# Altium PCB Sensor.PcbDoc (part 1 of 2)
Units mm, origin at the board's own origin, x right, y up, seen from the top; angles counter-clockwise.
Board outline 55 x 40.2 mm, 4 copper layers (Top Layer, Layer 1, Layer 2, Bottom Layer), stack 0.603 mm thick; 83 components, 66 nets, 402 pads, 132 vias.
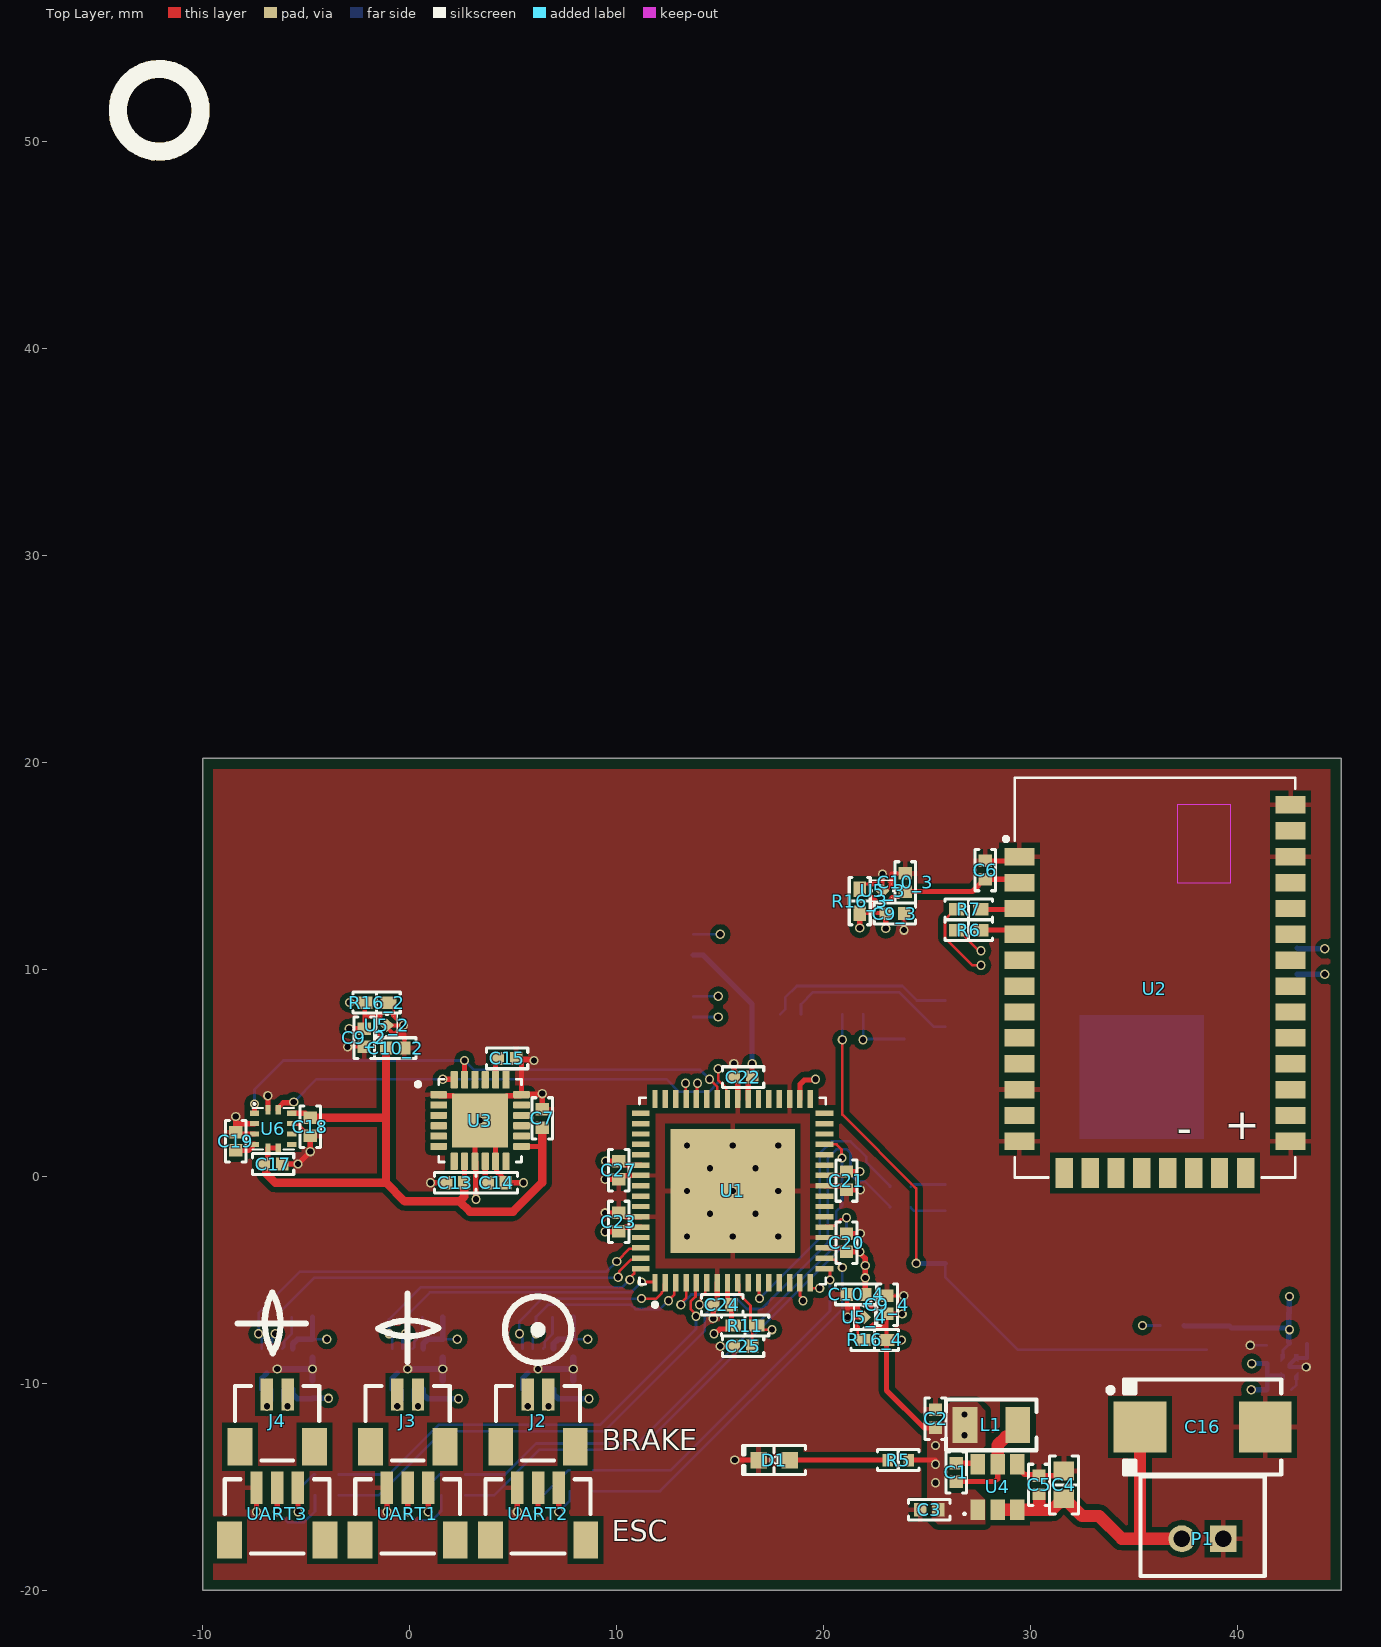
[diagram p0: Top Layer view]
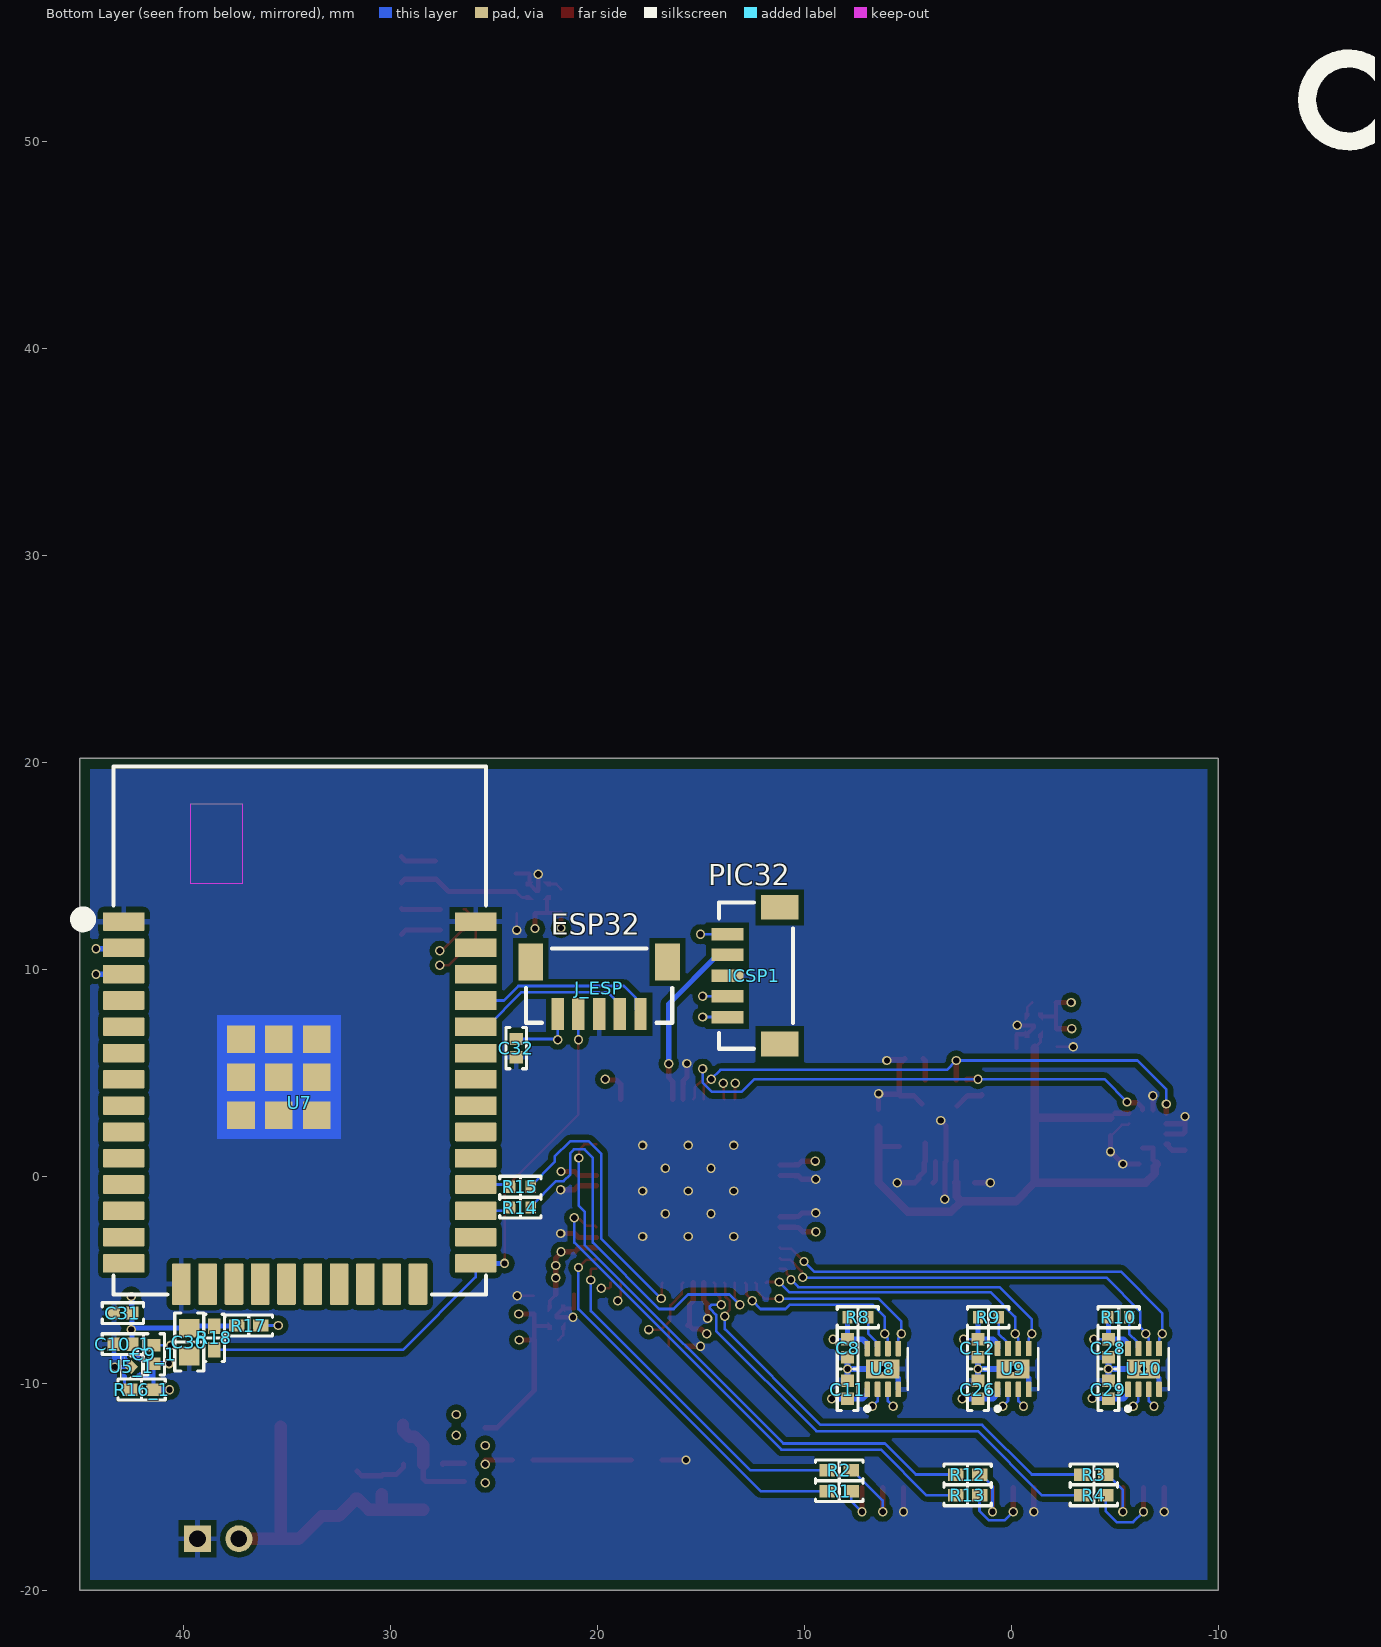
[diagram p1: Bottom Layer view, seen from below]
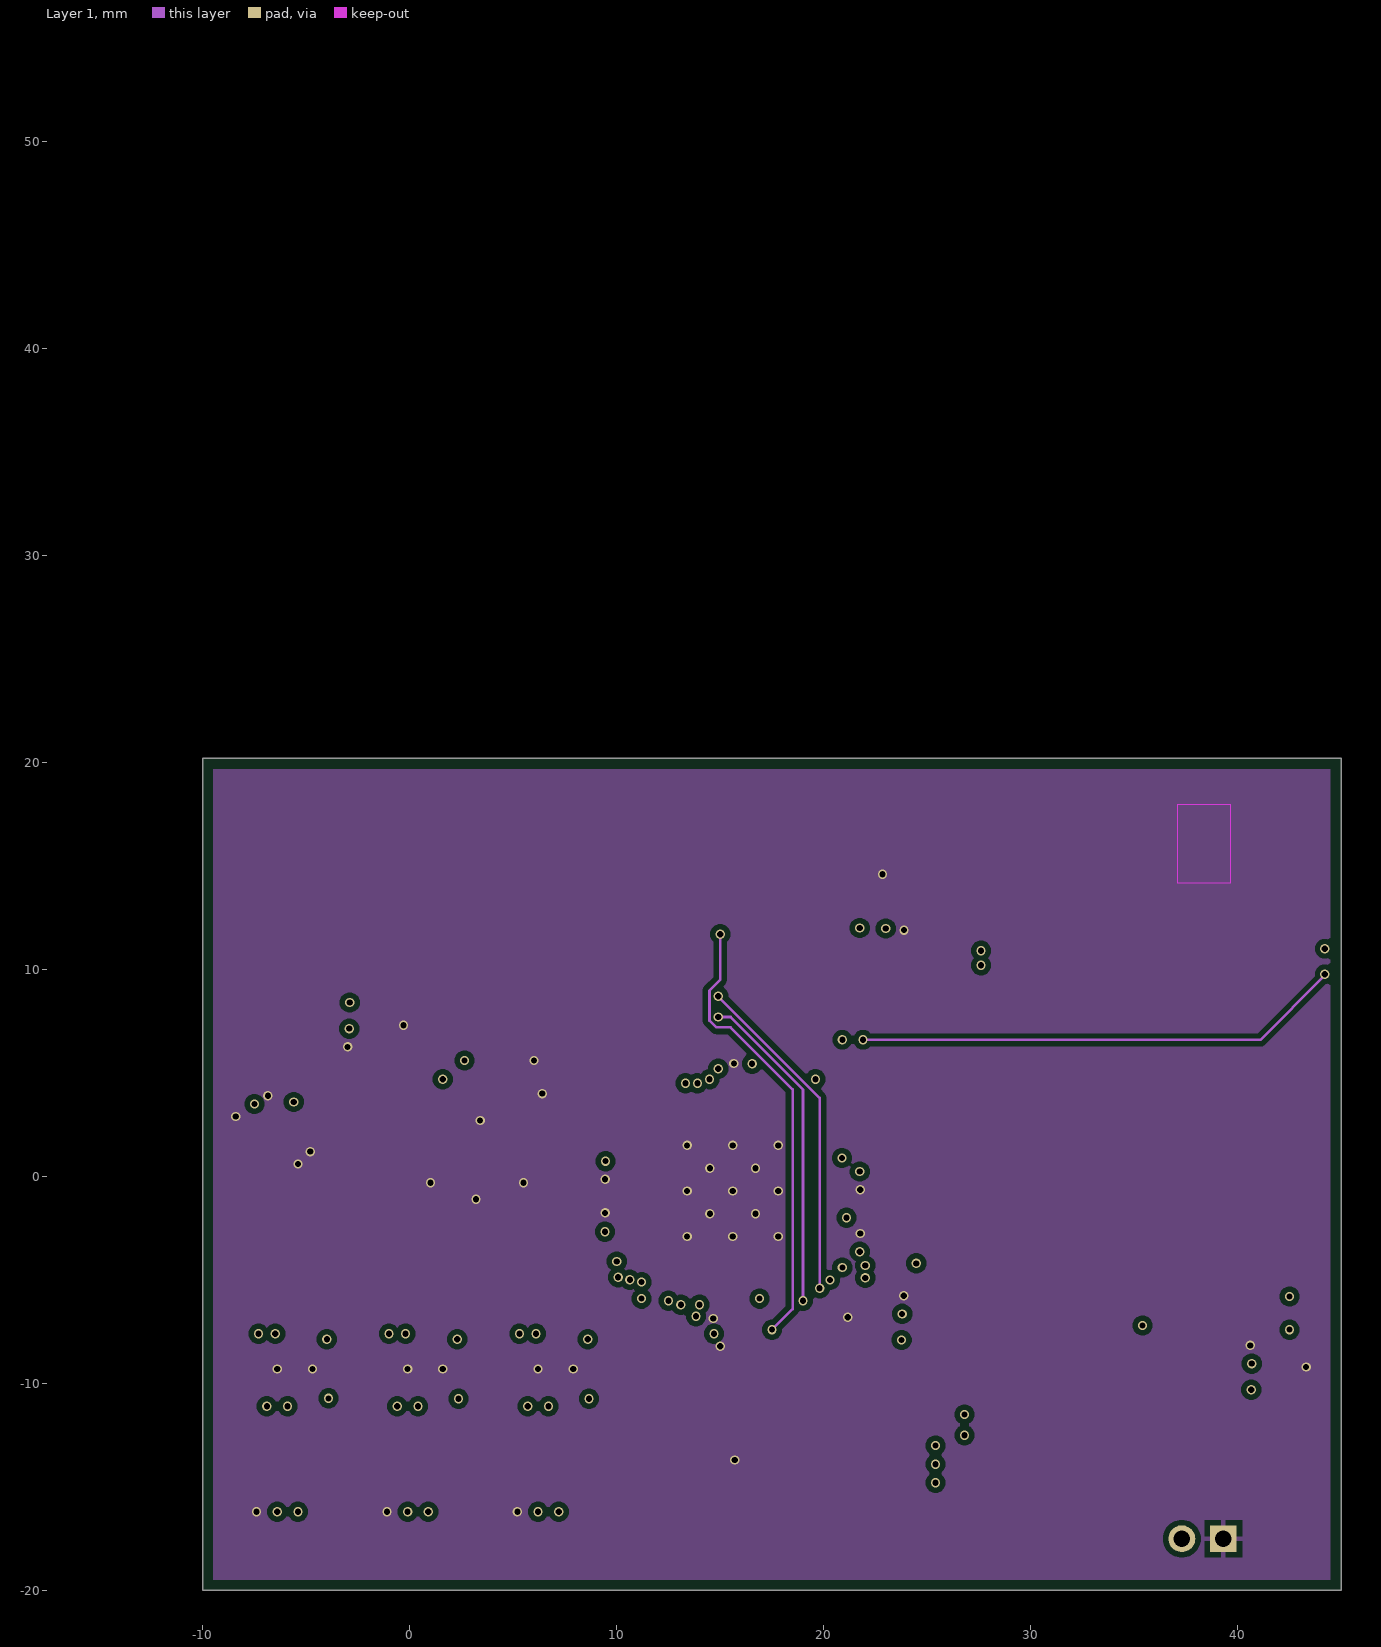
[diagram p2: Layer 1]
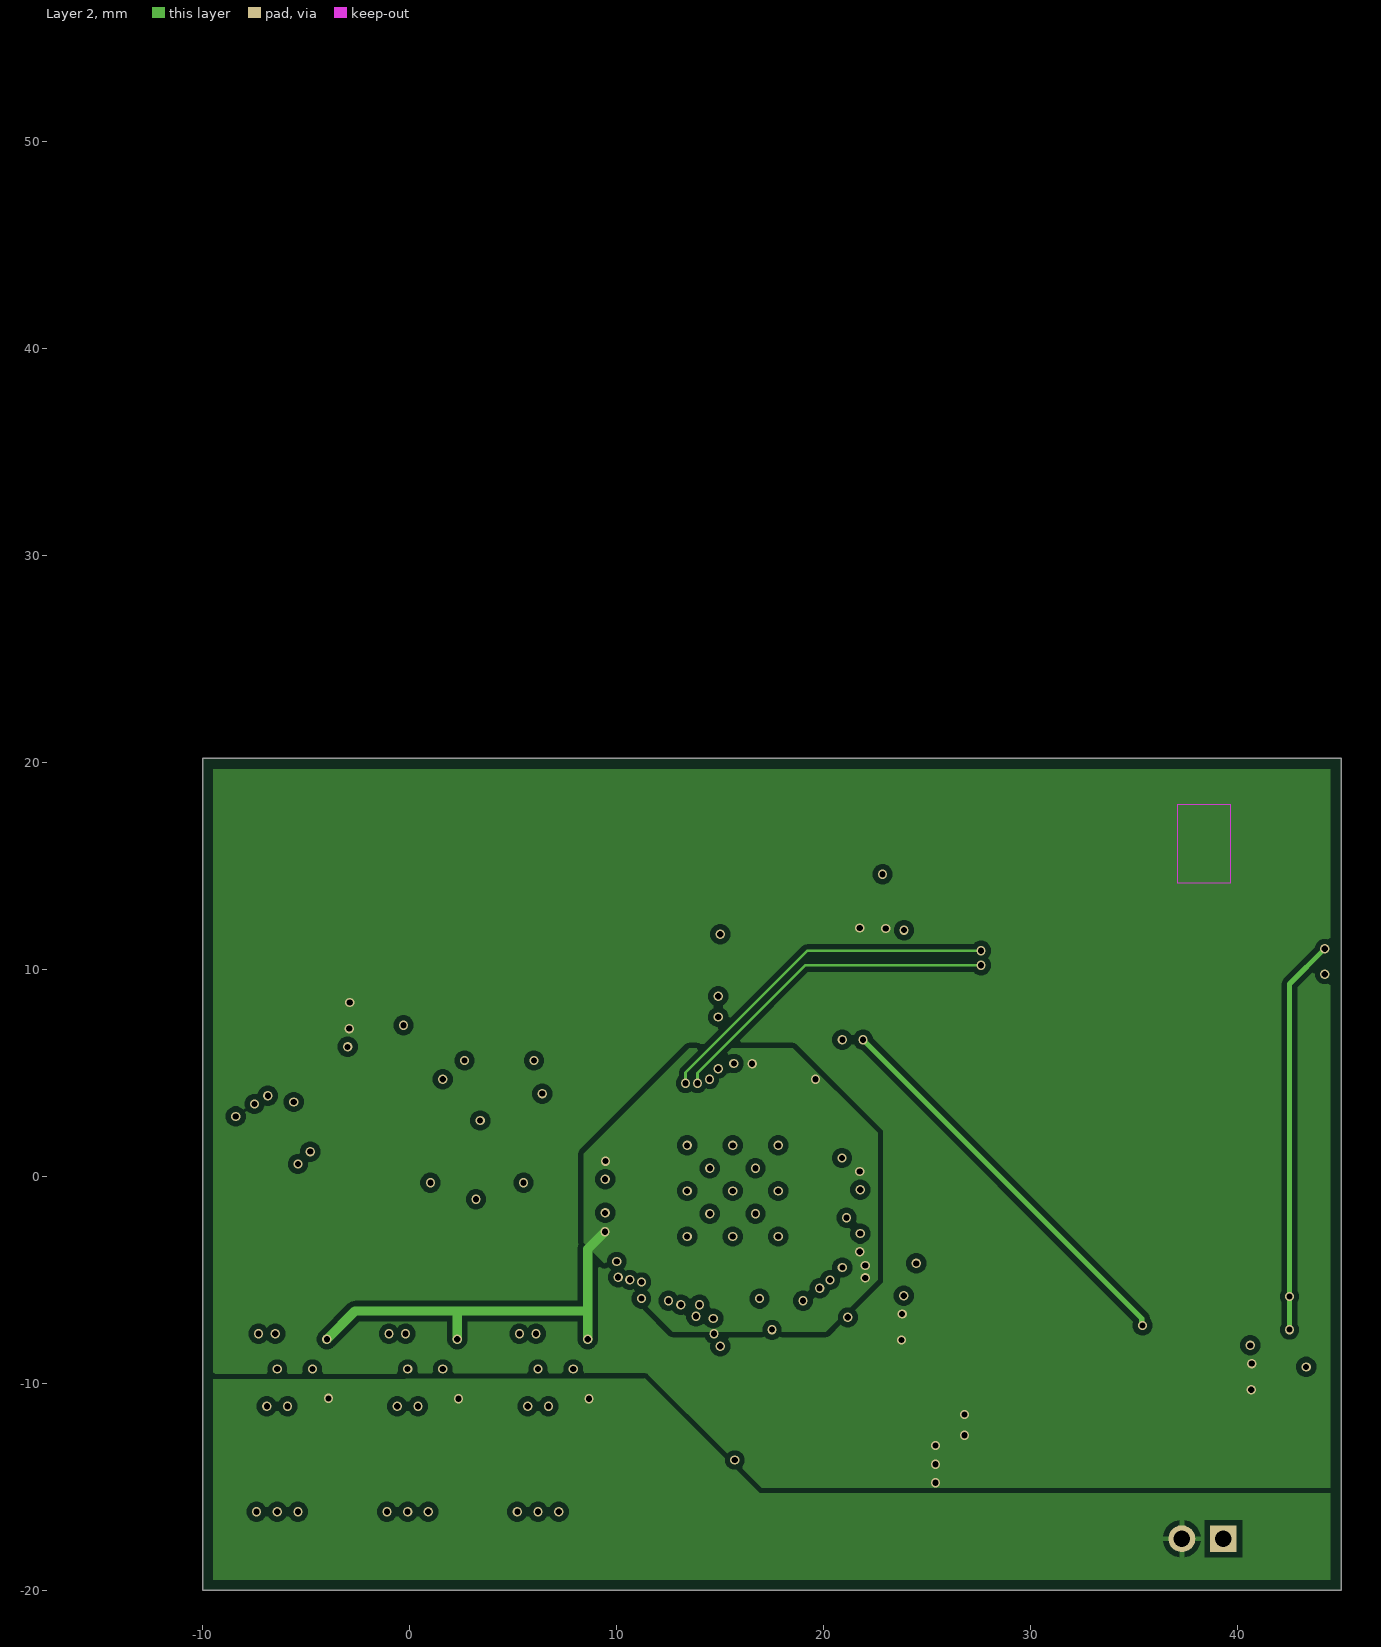
[diagram p3: Layer 2]

## Layer stack, top to bottom
Top Solder: solder mask 0.0102, Solder Resist, Dk 3.5
Top Layer: signal copper 0.0356
Dielectric 2: prepreg 0.0711, PP-006, Dk 4.1
Layer 1: signal copper 0.035
Dielectric 1: dielectric 0.32, FR-4, Dk 4.8
Layer 2: signal copper 0.035
Dielectric 3: prepreg 0.0711, PP-006, Dk 4.1
Bottom Layer: signal copper 0.0356
Bottom Solder: solder mask 0.0102, Solder Resist, Dk 3.5

## Board outline
-10,-20 -10,20.2 45,20.2 45,-20

## Design rules (kind name [scope] priority, off if disabled: settings)
BoardOutlineClearance [All] p1: gap=0.512 ignorepadtopadclearanceinfootprint=FALSE
Clearance "PolyGon Pour Clearance" [InPolygon] p1: gap=0.254 ignorepadtopadclearanceinfootprint=FALSE except(0: Arc-Hole Track-Hole SMDPad-Hole THPad-Hole Via-Hole Fill-Hole Poly-Hole Region-Hole Text-Hole; 0.512: Arc-Text Track-Text SMDPad-Text THPad-Text Via-Text Fill-Text Poly-Text Region-Text Text-Text)
Clearance [All] p2: gap=0.127 ignorepadtopadclearanceinfootprint=TRUE
HoleSize [All] p1: absolutevalues=TRUE maxlimit=10 minlimit=0.025 maxpercent=80.000 minpercent=20.000
PolygonConnect PolygonRelief [IsPolygon and not (IsNamedPolygon('PolygonDirect'))] p1: thpad.connectstyle=Relief thpad.reliefconductorwidth=0.254 thpad.reliefentries=4 thpad.polygonreliefangle="90 Angle" thpad.airgapwidth=0.254 smdpad.connectstyle=Relief smdpad.reliefconductorwidth=0.254 smdpad.reliefentries=4 smdpad.polygonreliefangle="90 Angle" smdpad.airgapwidth=0.254 via.connectstyle=Direct via.reliefconductorwidth=0.254 via.reliefentries=4 via.polygonreliefangle="90 Angle" via.airgapwidth=0.254
PolygonConnect PolygonDirect [All] p2: connectstyle=Direct reliefconductorwidth=0.254 reliefentries=4 polygonreliefangle="90 Angle" airgapwidth=0.254
RoutingVias [All] p1: holewidth=0.3 width=0.5 viastyle="Through Hole" minholewidth=0.3 minwidth=0.45 maxholewidth=0.7 maxwidth=1.27
SolderMaskExpansion [All] p1: expansion=0.102 istentingtop=FALSE
SupplyNets "Schematic Supply Nets" [InNet('VBAT')] p1: voltage=0.000
SupplyNets "Schematic Supply Nets_7" [InNet('3V3_ESP')] p2: voltage=0.000
SupplyNets "Schematic Supply Nets_5" [InNet('3V3_IMU')] p3: voltage=0.000
SupplyNets "Schematic Supply Nets_4" [InNet('3V3')] p4: voltage=0.000
SupplyNets "Schematic Supply Nets_3" [InNet('GND')] p5: voltage=0.000
SupplyNets "Schematic Supply Nets_2" [InNet('3V3_XBee')] p6: voltage=0.000
SupplyNets "Schematic Supply Nets_1" [InNet('5V')] p7: voltage=0.000
Width [All] p1: maxlimit=0.712 minlimit=0.127 preferedwidth=0.254
29 further rules are at their usual default settings.

## Classes and differential pairs
component class U_ESP32: C30 C31 C32 J_ESP R17 R18 U7
component class U_HBridges: C8 C11 C12 C26 C28 C29 J2 J3 J4 R8 R9 R10 U8 U9 U10
channel class 3V3_LDO: U_3V3_LDO2

## Components (designator, comment, footprint, x,y, rotation, side; value= is the part's Value field where it differs from the comment)
C1 "1 µF" "CAP 0402_1005" 26.4,-14.3 r270 top
C2 "1 µF" "CAP 0402_1005" 25.4,-11.7 r270 top
C3 "22 µF" "CAP 0402_1005" 25.1,-16.1 r0 top
C4 "22 µF" "CAP 0603_1608" 31.6,-14.9 r270 top
C5 "0.1 µF" "CAP 0402_1005" 30.4,-14.9 r270 top
C6 "1 µF" "CAP 0402_1005" 27.8,14.8 r90 top
C7 "0.1 µF" "CAP 0402_1005" 6.4,2.8 r90 top
C8 "0.1 µF" "CAP 0402_1005" 7.9,-8.3 r270 bottom
C9_1 "0.1 µF" "CAP 0402_1005" 41.4,-8.6 r270 bottom (schematic designator C9)
C9_2 "0.1 µF" "CAP 0402_1005" -2.2,6.7 r90 top (schematic designator C9)
C9_3 "0.1 µF" "CAP 0402_1005" 23.44,12.7 r180 top (schematic designator C9)
C9_4 "0.1 µF" "CAP 0402_1005" 23.06,-6.2 r270 top (schematic designator C9)
C10_1 "0.1 µF" "CAP 0402_1005" 42.9,-8.1 r180 bottom (schematic designator C10)
C10_2 "0.1 µF" "CAP 0402_1005" -0.7,6.2 r180 top (schematic designator C10)
C10_3 "0.1 µF" "CAP 0402_1005" 23.94,14.2 r270 top (schematic designator C10)
C10_4 "0.1 µF" "CAP 0402_1005" 21.56,-5.7 r0 top (schematic designator C10)
C11 "0.1 µF" "CAP 0402_1005" 7.9,-10.3 r270 bottom
C12 "0.1 µF" "CAP 0402_1005" 1.6,-8.3 r270 bottom
C13 "0.01 µF" "CAP 0402_1005" 2.2,-0.3 r180 top
C14 "0.1 µF" "CAP 0402_1005" 4.2,-0.3 r0 top
C15 "2200 pF" "CAP 0402_1005" 4.7,5.7 r0 top
C16 "100µF" "CAP POL 2917_7343" 38.3,-12.1 r0 top
C17 "1 µF" "CAP 0402_1005" -6.6,0.6 r0 top
C18 "0.1 µF" "CAP 0402_1005" -4.8,2.4 r270 top
C19 "0.1 µF" "CAP 0402_1005" -8.4,1.7 r90 top
C20 "0.1 µF" "CAP 0402_1005" 21.1,-3.2 r270 top
C21 "0.1 µF" "CAP 0402_1005" 21.1,-0.2 r90 top
C22 "0.1 µF" "CAP 0402_1005" 16.1,4.8 r0 top
C23 "0.1 µF" "CAP 0402_1005" 10.1,-2.2 r270 top
C24 "0.1 µF" "CAP 0402_1005" 15.1,-6.2 r0 top
C25 "0.1 µF" "CAP 0402_1005" 16.1,-8.2 r180 top
C26 "0.1 µF" "CAP 0402_1005" 1.6,-10.3 r270 bottom
C27 "0.1 µF" "CAP 0402_1005" 10.1,0.3 r90 top
C28 "0.1 µF" "CAP 0402_1005" -4.7,-8.3 r270 bottom
C29 "0.1 µF" "CAP 0402_1005" -4.7,-10.3 r270 bottom
C30 "22 µF" "CAP 0603_1608" 39.7,-8 r90 bottom
C31 "0.1 µF" "CAP 0402_1005" 42.9,-6.6 r180 bottom
C32 "0.1 µF" "CAP 0402_1005" 23.9,6.2 r90 bottom
D1 "Green" "LED 0603_1608 GREEN" 17.6,-13.7 r180 top
ICSP1 "BM05B-SRSS-TB(LF)(SN)" "JST BM05B-SRSS-TB" 12.438,9.7 r270 bottom
J2 "BM02B-SRSS-TB(LF)(SN)" "JST BM02B-SRSS-TB" 6.2,-11.8 r180 top
J3 "BM02B-SRSS-TB(LF)(SN)" "JST BM02B-SRSS-TB" -0.1,-11.8 r180 top
J4 "BM02B-SRSS-TB(LF)(SN)" "JST BM02B-SRSS-TB" -6.4,-11.8 r180 top
J_ESP "BM05B-SRSS-TB(LF)(SN)" "JST BM05B-SRSS-TB" 19.9,9.1 r180 bottom
L1 "4.7µH" "IND 1008_2520" 28.1,-12 r180 top
P1 "2 pin 2mm JST Male" "2pin - 2mm JST male" 38.3,-17.5 r180 top
R1 "22 Ohms" "RES 0402_1005" 8.3,-15.2 r180 bottom
R2 "22 Ohms" "RES 0402_1005" 8.3,-14.2 r180 bottom
R3 "22 Ohms" "RES 0402_1005" -4,-14.4 r180 bottom
R4 "22 Ohms" "RES 0402_1005" -4,-15.4 r180 bottom
R5 "1 kOhms" "YAGEO RES 0402_1005" 23.6,-13.7 r180 top
R6 "22 Ohms" "RES 0402_1005" 27,11.9 r0 top
R7 "22 Ohms" "RES 0402_1005" 27,12.9 r0 top
R8 "1 kOhms" "YAGEO RES 0402_1005" 7.4,-6.8 r180 bottom
R9 "1 kOhms" "YAGEO RES 0402_1005" 1.1,-6.8 r180 bottom
R10 "1 kOhms" "YAGEO RES 0402_1005" -5.2,-6.8 r180 bottom
R11 "10k" "RES 0402_1005" 16.2,-7.2 r0 top
R12 "22 Ohms" "RES 0402_1005" 2.1,-14.4 r180 bottom
R13 "22 Ohms" "RES 0402_1005" 2.1,-15.4 r180 bottom
R14 "22 Ohms" "YAGEO RES 0402_1005" 23.7,-1.5 r180 bottom
R15 "22 Ohms" "YAGEO RES 0402_1005" 23.7,-0.5 r180 bottom
R16_1 "10k" "RES 0402_1005" 42,-10.3 r0 bottom (schematic designator R16)
R16_2 "10k" "RES 0402_1005" -1.6,8.4 r0 top (schematic designator R16)
R16_3 "10k" "RES 0402_1005" 21.74,13.3 r90 top (schematic designator R16)
R16_4 "10k" "RES 0402_1005" 22.46,-7.9 r180 top (schematic designator R16)
R17 "10 kOhms" "RES 0402_1005" 36.825,-7.2 r180 bottom
R18 "10 kOhms" "RES 0402_1005" 38.5,-7.8 r90 bottom
U1 "PIC32MZ0512EFE064" QFN50P900X900X100-65N 15.6,-0.7 r90 top
U2 "XB3-24Z8UM-J" XCVR_XB3-24Z8UM-J 36,9.6 r0 top
U3 "MPU6050" IC_MPU6050 3.4,2.7 r0 top
U4 "AP63205WU-7" "TSOT-26-6 - 3.2mm" 28.4,-15 r180 top
U5_1 "3.3V LDO" XDFN-4 42.5,-9.2 r270 bottom (schematic designator U5)
U5_2 "3.3V LDO" XDFN-4 -1.1,7.3 r90 top (schematic designator U5)
U5_3 "3.3V LDO" XDFN-4 22.84,13.8 r180 top (schematic designator U5)
U5_4 "3.3V LDO" XDFN-4 21.96,-6.8 r270 top (schematic designator U5)
U6 "LIS3MDL" LGA12_ST -6.6,2.3 r0 top
U7 "ESP32" "Espressif ESP32-WROOM-32" 34.365,4.8 r180 bottom
U8 "DRV8837CDSGR" SON50P200X200X80-9N 6.2,-9.3 r90 bottom
U9 "DRV8837CDSGR" SON50P200X200X80-9N -0.1,-9.3 r90 bottom
U10 "DRV8837CDSGR" SON50P200X200X80-9N -6.4,-9.3 r90 bottom
UART1 "BM03B-SRSS-TB(LF)(SN)" "JST BM03B-SRSS-TB" -0.1,-16.3 r180 top
UART2 "BM03B-SRSS-TB(LF)(SN)" "JST BM03B-SRSS-TB" 6.2,-16.3 r180 top
UART3 "BM03B-SRSS-TB(LF)(SN)" "JST BM03B-SRSS-TB" -6.4,-16.3 r180 top

## Footprints (in the part's own frame and the unit in brackets; to place one, negate y for a bottom-side part, rotate by r counter-clockwise, add the part's x,y. Pads: shape width x height; smd on the part's side, far side on the other; paste and mask are expansions set on the pad)
"2pin - 2mm JST male" [mm]
  rect 1.3x1.3 hole 0.8: 1(-1,0)
  round 1.3 hole 0.8: 2(1,0)
  silkscreen extent -3,-3 3,1.8, body extent -2.93,-2.97 2.93,1.7, height 5.89
"CAP 0402_1005" [mm] "Chip Capacitor, 2-Leads, Body 1.02x0.51mm, IPC Medium Density"
  rect 0.6x0.64 smd: 1(-0.44,0) 2(0.44,0)
  silkscreen extent -1,-0.5 1,0.5, body extent -0.5,-0.26 0.5,0.26, height 0.52
"CAP 0603_1608" [mm] "Chip Capacitor, 2-Leads, Body 1.60x0.80mm, IPC Medium Density"
  rect 0.9x1 smd: 1(-0.675,0) 2(0.675,0)
  silkscreen extent -1.4,-0.7 1.4,0.7, body extent -0.8,-0.41 0.8,0.41, height 0.82
"CAP POL 2917_7343" [mm] "Molded Capacitor, 2-Leads, Body 7.30x4.30mm, IPC Medium Density"
  rect 2.55x2.45 smd: 1(-3.025,0) 2(3.025,0)
  silkscreen extent -4.57,-2.3 3.8,2.3, body extent -3.65,-2.15 3.65,2.15, height 4.1
"Espressif ESP32-WROOM-32" [mm] "39-SMD Module"
  rrect10% 2x0.9 smd paste+0 mask+0.05: 1(-8.5,7.51) 2(-8.5,6.24) 3(-8.5,4.97) 4(-8.5,3.7) 5(-8.5,2.43) 6(-8.5,1.16) 7(-8.5,-0.11) 8(-8.5,-1.38) 9(-8.5,-2.65) 10(-8.5,-3.92) 11(-8.5,-5.19) 12(-8.5,-6.46) 13(-8.5,-7.73) 14(-8.5,-9) 25(8.5,-9) 26(8.5,-7.73) 27(8.5,-6.46) 28(8.5,-5.19) 29(8.5,-3.92) 30(8.5,-2.65)
  rrect10% 0.9x2 smd paste+0 mask+0.05: 15(-5.715,-10) 16(-4.445,-10) 17(-3.175,-10) 18(-1.905,-10) 19(-0.635,-10) 20(0.635,-10) 21(1.905,-10) 22(3.175,-10) 23(4.445,-10) 24(5.715,-10)
  rect 2x0.9 smd paste+0 mask+0.05: 31(8.5,-1.38) 32(8.5,-0.11) 33(8.5,1.16) 34(8.5,2.43) 35(8.5,3.7) 36(8.5,4.97) 37(8.5,6.24) 38(8.5,7.51)
  rect 1.33x1.33 smd paste+0 mask+0.05: 39(-2.835,-1.835) 39(-2.835,0) 39(-2.835,1.835) 39(-1,0) 39(-1,-1.835) 39(-1,1.835) 39(0.835,-1.835) 39(0.835,0) 39(0.835,1.835)
  Top Layer region: -4.001,3 1.999,3 1.999,-3 -4.001,-3
  silkscreen extent -10.71,-10.5 9,15, body extent -9,-10.5 9,15, height 3.2
IC_MPU6050 [mm]
  rrect25% 0.8x0.35 smd: 1(-2,1.25) 2(-2,0.75) 3(-2,0.25) 4(-2,-0.25) 5(-2,-0.75) 6(-2,-1.25) 13(2,-1.25) 14(2,-0.75) 15(2,-0.25) 16(2,0.25) 17(2,0.75) 18(2,1.25)
  rrect25% 0.35x0.85 smd: 7(-1.25,-1.975) 8(-0.75,-1.975) 9(-0.25,-1.975) 10(0.25,-1.975) 11(0.75,-1.975) 12(1.25,-1.975) 19(1.25,1.975) 20(0.75,1.975) 21(0.25,1.975) 22(-0.25,1.975) 23(-0.75,1.975) 24(-1.25,1.975)
  rect 2.7x2.6 smd paste-2: 25(0,0)
  silkscreen extent -3.1,-2 2,2, body extent -2,-2 2,2, height 0.93
"IND 1008_2520" [mm] "Chip Inductance, 2-leads, Body 2.5x2.1mm, IPC Medium Density"
  rect 1.2x1.75 smd: 1(-1.275,0) 2(1.275,0)
  silkscreen extent -2.18,-1.22 2.2,1.22, body extent -1.3,-1.05 1.3,1.05, height 1
"JST BM02B-SRSS-TB" [mm] "1.0mm pitch/Disconnectable Crimp style connector"
  rect 0.6x1.55 smd: 1(-0.5,-1.262) 2(0.5,-1.262)
  rect 1.2x1.8 smd: M(-1.8,1.262) M(1.8,1.262)
  silkscreen extent -2.03,-1.68 2.03,1.91, body extent -2,-1.69 2,1.91, height 4.32
"JST BM03B-SRSS-TB" [mm] "1.0mm pitch/Disconnectable Crimp style connector"
  rect 0.6x1.55 smd: 1(-1,-1.262) 2(0,-1.262) 3(1,-1.262)
  rect 1.2x1.8 smd: M(-2.3,1.262) M(2.3,1.262)
  silkscreen extent -2.53,-1.68 2.53,1.91, body extent -2.5,-1.69 2.5,1.91, height 4.32
"JST BM05B-SRSS-TB" [mm] "1.0mm pitch/Disconnectable Crimp style connector"
  rect 0.6x1.55 smd: 1(-2,-1.262) 2(-1,-1.262) 3(0,-1.262) 4(1,-1.262) 5(2,-1.262)
  rect 1.2x1.8 smd: M(-3.3,1.262) M(3.3,1.262)
  silkscreen extent -3.53,-1.68 3.53,1.91, body extent -3.5,-1.69 3.5,1.91, height 4.32
"LED 0603_1608 GREEN" [mm] "Chip Diode, 2-Leads, Body 1.60x0.80mm, IPC Medium Density"
  rect 0.8x0.8 smd: 1(-0.75,0) 2(0.75,0)
  silkscreen extent -1.52,-0.7 1.52,0.7, body extent -0.8,-0.4 0.8,0.4, height 0.53
LGA12_ST [mm]
  rect 0.45x0.25 smd: 1(-0.9,0.75) 2(-0.9,0.25) 3(-0.9,-0.25) 4(-0.9,-0.75) 7(0.9,-0.75) 8(0.9,-0.25) 9(0.9,0.25) 10(0.9,0.75)
  rect 0.25x0.45 smd: 5(-0.25,-0.925) 6(0.25,-0.925) 11(0.25,0.925) 12(-0.25,0.925)
  silkscreen extent -1,-1 1,1.25, body extent -1,-1 1,1, height 0.25
QFN50P900X900X100-65N [mm]
  rect 0.86x0.26 smd: 1(-4.435,3.75) 2(-4.435,3.25) 3(-4.435,2.75) 4(-4.435,2.25) 5(-4.435,1.75) 6(-4.435,1.25) 7(-4.435,0.75) 8(-4.435,0.25) 9(-4.435,-0.25) 10(-4.435,-0.75) 11(-4.435,-1.25) 12(-4.435,-1.75) 13(-4.435,-2.25) 14(-4.435,-2.75) 15(-4.435,-3.25) 16(-4.435,-3.75) 33(4.435,-3.75) 34(4.435,-3.25) 35(4.435,-2.75) 36(4.435,-2.25) 37(4.435,-1.75) 38(4.435,-1.25) 39(4.435,-0.75) 40(4.435,-0.25) 41(4.435,0.25) 42(4.435,0.75) 43(4.435,1.25) 44(4.435,1.75) 45(4.435,2.25) 46(4.435,2.75) 47(4.435,3.25) 48(4.435,3.75)
  rect 0.26x0.86 smd: 17(-3.75,-4.435) 18(-3.25,-4.435) 19(-2.75,-4.435) 20(-2.25,-4.435) 21(-1.75,-4.435) 22(-1.25,-4.435) 23(-0.75,-4.435) 24(-0.25,-4.435) 25(0.25,-4.435) 26(0.75,-4.435) 27(1.25,-4.435) 28(1.75,-4.435) 29(2.25,-4.435) 30(2.75,-4.435) 31(3.25,-4.435) 32(3.75,-4.435) 49(3.75,4.435) 50(3.25,4.435) 51(2.75,4.435) 52(2.25,4.435) 53(1.75,4.435) 54(1.25,4.435) 55(0.75,4.435) 56(0.25,4.435) 57(-0.25,4.435) 58(-0.75,4.435) 59(-1.25,4.435) 60(-1.75,4.435) 61(-2.25,4.435) 62(-2.75,4.435) 63(-3.25,4.435) 64(-3.75,4.435)
  rect 6x6 smd: 65(0,0)
  silkscreen extent -5.59,-4.5 4.5,4.5, body extent -4.52,-4.52 4.52,4.52, height 0.9
"RES 0402_1005" [mm] "Chip Resistor, 2-Leads, Body 1.0x0.5mm, IPC Medium Density"
  rect 0.75x0.6 smd: 1(-0.575,0) 2(0.575,0)
  silkscreen extent -1.14,-0.51 1.14,0.51, body extent -0.5,-0.25 0.5,0.25, height 0.35
SON50P200X200X80-9N [mm]
  rrect25% 0.74x0.28 smd: 1(-0.985,0.75) 2(-0.985,0.25) 3(-0.985,-0.25) 4(-0.985,-0.75) 5(0.985,-0.75) 6(0.985,-0.25) 7(0.985,0.25) 8(0.985,0.75)
  rect 0.9x1.6 smd paste-2: 9(0,0)
  silkscreen extent -2.02,-1.21 1,1.21, body extent -1,-1 1,1, height 0.75
"TSOT-26-6 - 3.2mm" [mm]
  rect 0.7x1 smd: 1(0.95,1.1) 2(0,1.1) 3(-0.95,1.1) 4(-0.95,-1.1) 5(0,-1.1) 6(0.95,-1.1)
  silkscreen extent 1.54,1.25 1.65,1.35, body extent -1.45,-1.2 1.45,1.2, height 1
XCVR_XB3-24Z8UM-J [mil]
  rect 57x33 smd: 1(-258,230) 2(-258,180.8) 3(-258,131.6) 4(-258,82.4) 5(-258,33.2) 6(-258,-16) 7(-258,-65.2) 8(-258,-114.4) 9(-258,-163.6) 10(-258,-212.8) 11(-258,-262) 12(-258,-311.2) 21(258,-311.2) 22(258,-262) 23(258,-212.8) 24(258,-163.6) 25(258,-114.4) 26(258,-65.2) 27(258,-16) 28(258,33.2) 29(258,82.4) 30(258,131.6) 31(258,180.8) 32(258,230) 33(258,279.2) 34(258,329)
  rect 33x57 smd: 13(-172.5,-371.5) 14(-123.3,-371.5) 15(-74.1,-371.5) 16(-24.9,-371.5) 17(24.3,-371.5) 18(73.5,-371.5) 19(122.7,-371.5) 20(172.5,-371.5)
  Keep-Out Layer region: 143.5,180 43.5,180 43.5,330 143.5,330
  silkscreen extent -287,-380 266,380, body extent -267,-380 267,380, height 97
XDFN-4 [mil]
  round 1 smd mask+2.56: 1(-16.93,12.79) 2(-16.93,-12.79) 3(16.93,-12.79) 4(16.93,12.79)
  rect 18.9x18.9 smd rot 135 mask+2.56: 5(0,0)
  Top Layer region: 16.93,-8.65 9.84,-15.75 9.84,-16.93 24.02,-16.93 24.02,-8.65
  Top Layer region: 16.93,8.65 9.84,15.75 9.84,16.93 24.02,16.93 24.02,8.65
  Top Layer region: -16.93,-8.65 -9.84,-15.75 -9.84,-16.93 -24.02,-16.93 -24.02,-8.65
  Top Layer region: -16.93,8.65 -9.84,15.75 -9.84,16.93 -24.02,16.93 -24.02,8.65
  silkscreen extent -31,-20 20,20, body extent -20,-20 20,20, height 16
"YAGEO RES 0402_1005" [mm] "Chip Resistor, 2-Leads, Body 1.0x0.5mm"
  rect 0.5x0.6 smd: 1(-0.5,0) 2(0.5,0)
  silkscreen extent -1,-0.51 1,0.51, body extent -0.5,-0.25 0.5,0.25, height 0.35

## Part data
C1 C2 C3 C6 C13 C15 C17: library part C0402C104K4RACAUTO, "CAP CER 0.1UF 16V X7R 0402", Capacitance="0.1 µF", Device Package="0402 (1005 Metric)", Manufacturer=KEMET, Operating Temperature="-55°C ~ 125°C", Ratings=AEC-Q200, Supplier Part Number 1=399-6828-1-ND, Temperature Coefficient=X7R, Tolerance=±10%, Voltage - Rated=16V, Applications="Automotive, Bypass, Decoupling", ComponentLink1Description=Datasheet, ComponentLink1URL=https://api.kemet.com/component-edge/download/specsheet/C0402C104K4RACAUTO.pdf, ComponentLink2Description="DigiKey Link", ComponentLink2URL=https://www.digikey.com/en/products/detail/kemet/C0402C104K4RACAUTO/3314827, LastUpdated="8/14/2022 9:05:51 PM", Lifecycle Status=Active, Minimum Order=1, Mounting Type="Surface Mount, MLCC", Package / Case="0402 (1005 Metric)", Packaging=TapeAndReel, Part Number=C0402C104K4RACAUTO, Part Status=Active, PartId=3024, Price=0.01, Series="SMD Auto X7R", Size / Dimension="0.039\" L x 0.020\" W (1.00mm x 0.50mm)", Supplier 1=DigiKey, Thickness (Max)="0.022\" (0.55mm)"
C4 C30: library part C0603B476M007T, "CAP CER 47UF 6.3V X5R 0603", Capacitance="47 µF", Device Package="0603 (1608 Metric)", Manufacturer="Holy Stone Enterprise Co., Ltd.", Operating Temperature="-55°C ~ 85°C", Supplier Part Number 1=4587-C0603B476M007TCT-ND, Temperature Coefficient=X5R, Tolerance=±20%, Voltage - Rated=6.3V, Applications="SMPS Filtering", ComponentLink1Description=Datasheet, ComponentLink1URL=https://media.digikey.com/pdf/Data%20Sheets/Holy%20Stone/HCC_Series_DS.pdf, ComponentLink2Description="DigiKey Link", ComponentLink2URL=https://www.digikey.com/en/products/detail/holy-stone-enterprise-co-ltd/C0603B476M007T/16895203, LastUpdated="2/9/2024 8:09:41 PM", Lifecycle Status=Active, Minimum Order=1, Mounting Type="Surface Mount, MLCC", Package / Case="0603 (1608 Metric)", Packaging=TapeAndReel, Part Number=C0603B476M007T, Part Status=Active, PartId=48531, Price=0.12, Series=HCC, Size / Dimension="0.063\" L x 0.031\" W (1.60mm x 0.80mm)", Supplier 1=DigiKey, Thickness (Max)="0.039\" (1.00mm)"
C5 C7 C8 C9_1 C9_2 C9_3 C9_4 C10_1 C10_2 C10_3 C10_4 C11 C12 C14 C18 C19 C20 C21 C22 C23 C24 C25 C26 C27 C28 C29: library part C0402C104K4RACAUTO, "CAP CER 0.1UF 16V X7R 0402", Device Package="0402 (1005 Metric)", Manufacturer=KEMET, Operating Temperature="-55°C ~ 125°C", Ratings=AEC-Q200, Supplier Part Number 1=399-6828-1-ND, Temperature Coefficient=X7R, Tolerance=±10%, Voltage - Rated=16V, Applications="Automotive, Bypass, Decoupling", Capacitance="0.1 µF", ComponentLink1Description=Datasheet, ComponentLink1URL=https://api.kemet.com/component-edge/download/specsheet/C0402C104K4RACAUTO.pdf, ComponentLink2Description="DigiKey Link", ComponentLink2URL=https://www.digikey.com/en/products/detail/kemet/C0402C104K4RACAUTO/3314827, LastUpdated="8/14/2022 9:05:51 PM", Lifecycle Status=Active, Minimum Order=1, Mounting Type="Surface Mount, MLCC", Package / Case="0402 (1005 Metric)", Packaging=TapeAndReel, Part Number=C0402C104K4RACAUTO, Part Status=Active, PartId=3024, Price=0.01, Series="SMD Auto X7R", Size / Dimension="0.039\" L x 0.020\" W (1.00mm x 0.50mm)", Supplier 1=DigiKey, Thickness (Max)="0.022\" (0.55mm)"
C16: library part 293D107X0020E2TE3, "CAP TANT 100UF 20% 20V 2917", Device Package="2917 (7343 Metric)", ESR (Equivalent Series Resistance)=500mOhm, Manufacturer="Vishay Sprague", Manufacturer Size Code=E, Operating Temperature="-55°C ~ 125°C", Supplier Part Number 1=718-293D107X0020E2TE3CT-ND, Tolerance=±20%, Capacitance=100µF, ComponentLink1Description=Datasheet, ComponentLink1URL=http://www.vishay.com/docs/40002/293d.pdf, ComponentLink2Description="DigiKey Link", ComponentLink2URL=http://digikey.com/product-detail/en/vishay-sprague/293D107X0020E2TE3/718-293D107X0020E2TE3CT-ND/10507022, Features="General Purpose", Height - Seated (Max)="0.170\" (4.32mm)", LastUpdated="13-Aug-20 10:43:35 AM", Lifecycle Status=Active, Minimum Order=1, Mounting Type="Surface Mount", Package / Case="2917 (7343 Metric)", Packaging=TapeAndReel, Part Number=293D107X0020E2TE3, Part Status=Active, PartId=1360, Price=0.70, Series="TANTAMOUNT®, 293D", Size / Dimension="0.287\" L x 0.169\" W (7.30mm x 4.30mm)", Supplier 1=DigiKey, Type=Molded
C31 C32: library part C1005X5R1E104K050BC, "CAP CER 0.1UF 25V X5R 0402", Device Package="0402 (1005 Metric)", Manufacturer="TDK Corporation", Operating Temperature="-55°C ~ 85°C", Supplier Part Number 1=445-4964-1-ND, Temperature Coefficient=X5R, Tolerance=±10%, Voltage - Rated=25V, Applications="General Purpose", Capacitance="0.1 µF", ComponentLink1Description=Datasheet, ComponentLink1URL=https://product.tdk.com/info/en/catalog/datasheets/mlcc_commercial_general_en.pdf?ref_disty=digikey, ComponentLink2Description="DigiKey Link", ComponentLink2URL=https://www.digikey.com/en/products/detail/tdk-corporation/C1005X5R1E104K050BC/2093232, Features="Low ESL", LastUpdated="9/24/2023 7:03:59 PM", Lifecycle Status=Active, Minimum Order=1, Mounting Type="Surface Mount, MLCC", Package / Case="0402 (1005 Metric)", Packaging=TapeAndReel, Part Number=C1005X5R1E104K050BC, Part Status=Active, PartId=34396, Price=0.01, Series=C, Size / Dimension="0.039\" L x 0.020\" W (1.00mm x 0.50mm)", Supplier 1=DigiKey, Thickness (Max)="0.022\" (0.55mm)"
D1: library part XZCDGK53W-8VF, "1.6X0.8MM LC GREEN PIXSOLED DOME", Current - Test=2mA, Device Package="0603 (1608 Metric)", Lens Color=Colorless, Manufacturer=SunLED, Millicandela Rating=417mcd, Supplier Device Package=2-SMD, Supplier Part Number 1=1497-XZCDGK53W-8VFCT-ND, Voltage - Forward (Vf) (Typ)=2.65V, Color=Green, ComponentLink1Description=Datasheet, ComponentLink1URL=https://www.sunledusa.com/products/spec/XZCDGK53W-8VF.pdf, ComponentLink2Description="DigiKey Link", ComponentLink2URL=http://digikey.com/product-detail/en/sunled/XZCDGK53W-8VF/1497-XZCDGK53W-8VFCT-ND/10449792, Configuration=Independent, Height (Max)=1.10mm, LastUpdated="21-Jan-20 3:12:09 AM", Lens Size="0.35mm Dia", Lens Style="Round with Domed Top", Lens Transparency=Clear, Lifecycle Status=Active, Minimum Order=1, Mounting Type="Surface Mount", Package / Case="0603 (1608 Metric)", Packaging=Unknown, Part Number=XZCDGK53W-8VF, Part Status=Active, PartId=938, Price=0.18, Series="Ultra Low Current", Size / Dimension="1.60mm L x 0.80mm W", Supplier 1=DigiKey, Viewing Angle=60°, Wavelength - Dominant=525nm, Wavelength - Peak=515nm
ICSP1 J_ESP: "CONN HEADER SMD 5POS 1MM", Current Rating (Amps)=0.7A, Insulation Color=Natural, Manufacturer="JST Sales America Inc.", Material Flammability Rating="UL94 V-0", Operating Temperature="-25°C ~ 85°C", Supplier Part Number 1=455-1791-1-ND, Voltage Rating=50V, ComponentLink1Description=Datasheet, ComponentLink1URL=http://www.jst-mfg.com/product/pdf/eng/eSR.pdf, ComponentLink2Description="DigiKey Link", ComponentLink2URL=http://digikey.com/product-detail/en/jst-sales-america-inc/BM05B-SRSS-TB-LF-SN/455-1791-1-ND/926862, Connector Type=Header, Contact Finish - Mating=Tin, Contact Finish - Post=Tin, Contact Material="Copper Alloy", Contact Shape=Square, Contact Type="Male Pin", Fastening Type=Push-Pull, Features="Solder Retention", Insulation Height="0.167\" (4.25mm)", Insulation Material="Polyamide (PA), Nylon", LastUpdated="1/12/2020 10:14:00 PM", Lifecycle Status=Active, Minimum Order=1, Mounting Type="Surface Mount", Number of Positions=5, Number of Positions Loaded=All, Number of Rows=1, Packaging=TapeAndReel, Part Number=BM05B-SRSS-TB(LF)(SN), Part Status=Active, PartId=18, Pitch - Mating="0.039\" (1.00mm)", Price=0.35, Series=SR, Shrouding="Shrouded - 4 Wall", Style="Board to Cable/Wire", Supplier 1=DigiKey, Termination=Solder
J2 J3 J4: "CONN HEADER SMD 2POS 1MM", Current Rating (Amps)=0.7A, Insulation Color=Natural, Manufacturer="JST Sales America Inc.", Material Flammability Rating="UL94 V-0", Operating Temperature="-25°C ~ 85°C", Supplier Part Number 1=455-1788-1-ND, Voltage Rating=50V, ComponentLink1Description=Datasheet, ComponentLink1URL=http://www.jst-mfg.com/product/pdf/eng/eSR.pdf, ComponentLink2Description="DigiKey Link", ComponentLink2URL=http://digikey.com/product-detail/en/jst-sales-america-inc/BM02B-SRSS-TB-LF-SN/455-1788-1-ND/926859, Connector Type=Header, Contact Finish - Mating=Tin, Contact Finish - Post=Tin, Contact Material="Copper Alloy", Contact Shape=Square, Contact Type="Male Pin", Fastening Type=Push-Pull, Features="Solder Retention", Insulation Height="0.167\" (4.25mm)", Insulation Material="Polyamide (PA), Nylon", LastUpdated="1/12/2020 10:11:04 PM", Lifecycle Status=Active, Minimum Order=1, Mounting Type="Surface Mount", Number of Positions=2, Number of Positions Loaded=All, Number of Rows=1, Packaging=TapeAndReel, Part Number=BM02B-SRSS-TB(LF)(SN), Part Status=Active, PartId=12, Pitch - Mating="0.039\" (1.00mm)", Price=0.22, Series=SR, Shrouding="Shrouded - 4 Wall", Style="Board to Cable/Wire", Supplier 1=DigiKey, Termination=Solder
L1: library part MLP2520S4R7ST0S1, "FIXED IND 4.7UH 1A 110 MOHM SMD", Current Rating (Amps)=1A, DC Resistance (DCR)="143mOhm Max", Device Package="1008 (2520 Metric)", Inductance Frequency - Test=2MHz, Manufacturer="TDK Corporation", Operating Temperature="-40°C ~ 125°C", Supplier Part Number 1=445-6378-1-ND, Tolerance=±20%, ComponentLink1Description=Datasheet, ComponentLink1URL=https://product.tdk.com/info/en/catalog/datasheets/inductor_commercial_power_mlp2520_en.pdf?ref_disty=digikey, ComponentLink2Description="DigiKey Link", ComponentLink2URL=http://digikey.com/product-detail/en/tdk-corporation/MLP2520S4R7ST0S1/445-6378-1-ND/2465705, Height - Seated (Max)="0.039\" (1.00mm)", Inductance=4.7µH, LastUpdated="13-Aug-20 11:03:40 AM", Lifecycle Status=Active, Material - Core=Ferrite, Minimum Order=1, Mounting Type="Surface Mount", Package / Case="1008 (2520 Metric)", Packaging=TapeAndReel, Part Number=MLP2520S4R7ST0S1, Part Status=Active, PartId=3467, Price=0.14, Series=MLP, Shielding=Shielded, Size / Dimension="0.098\" L x 0.079\" W (2.50mm x 2.00mm)", Supplier 1=DigiKey, Supplier Device Package="1008 (2520 Metric)", Type=Multilayer
R1 R2 R3 R4 R6 R7 R11 R12 R13: library part RK73H1ETTP1432F, "RES 14.3K OHM 1% 1/10W 0402", Device Package="0402 (1005 Metric)", Manufacturer="KOA Speer Electronics, Inc.", Operating Temperature="-55°C ~ 155°C", Power (Watts)="0.1W, 1/10W", Ratings=AEC-Q200, Resistance="14.3 kOhms", Supplier Device Package=0402, Supplier Part Number 1=2019-RK73H1ETTP1432FCT-ND, Temperature Coefficient=±100ppm/°C, Tolerance=±1%, ComponentLink1Description=Datasheet, ComponentLink1URL=http://www.koaspeer.com/catimages/Products/RK73H/RK73H.pdf, ComponentLink2Description="DigiKey Link", ComponentLink2URL=https://www.digikey.com/en/products/detail/koa-speer-electronics-inc/RK73H1ETTP1432F/9844351, Composition="Thick Film", Features="Automotive AEC-Q200, Moisture Resistant", Height - Seated (Max)="0.016\" (0.40mm)", LastUpdated="8/14/2022 9:23:49 PM", Lifecycle Status=Active, Minimum Order=1, Number of Terminations=2, Package / Case="0402 (1005 Metric)", Packaging=CutTape, Part Number=RK73H1ETTP1432F, Part Status=Active, PartId=10193, Price=0.01, Series=RK73H, Size / Dimension="0.039\" L x 0.020\" W (1.00mm x 0.50mm)", Supplier 1=DigiKey
R5 R8 R9 R10: library part RC0402FR-071KL, "RES 1K OHM 1% 1/16W 0402", Device Package="0402 (1005 Metric)", Manufacturer=Yageo, Operating Temperature="-55°C ~ 155°C", Power (Watts)="0.063W, 1/16W", Supplier Device Package=0402, Supplier Part Number 1=311-1.00KLRCT-ND, Temperature Coefficient=±100ppm/°C, Tolerance=±1%, ComponentLink1Description=Datasheet, ComponentLink1URL=https://www.yageo.com/upload/media/product/productsearch/datasheet/rchip/PYu-RC_Group_51_RoHS_L_10.pdf, ComponentLink2Description="DigiKey Link", ComponentLink2URL=https://www.digikey.com/en/products/detail/yageo/RC0402FR-071KL/726513, Composition="Thick Film", Features="Moisture Resistant", Height - Seated (Max)="0.016\" (0.40mm)", LastUpdated="7/25/2024 9:18:11 AM", Lifecycle Status=Active, Minimum Order=1, Number of Terminations=2, Package / Case="0402 (1005 Metric)", Packaging=CutTape, Part Number=RC0402FR-071KL, Part Status=Active, PartId=17596, Price=0.01, Resistance="1 kOhms", Series=RC_L, Size / Dimension="0.039\" L x 0.020\" W (1.00mm x 0.50mm)", Supplier 1=DigiKey
R14 R15: library part RC0402FR-071KL, "RES 1K OHM 1% 1/16W 0402", Device Package="0402 (1005 Metric)", Manufacturer=Yageo, Operating Temperature="-55°C ~ 155°C", Power (Watts)="0.063W, 1/16W", Resistance="1 kOhms", Supplier Device Package=0402, Supplier Part Number 1=311-1.00KLRCT-ND, Temperature Coefficient=±100ppm/°C, Tolerance=±1%, ComponentLink1Description=Datasheet, ComponentLink1URL=https://www.yageo.com/upload/media/product/productsearch/datasheet/rchip/PYu-RC_Group_51_RoHS_L_10.pdf, ComponentLink2Description="DigiKey Link", ComponentLink2URL=https://www.digikey.com/en/products/detail/yageo/RC0402FR-071KL/726513, Composition="Thick Film", Features="Moisture Resistant", Height - Seated (Max)="0.016\" (0.40mm)", LastUpdated="7/25/2024 9:18:11 AM", Lifecycle Status=Active, Minimum Order=1, Number of Terminations=2, Package / Case="0402 (1005 Metric)", Packaging=CutTape, Part Number=RC0402FR-071KL, Part Status=Active, PartId=17596, Price=0.01, Series=RC_L, Size / Dimension="0.039\" L x 0.020\" W (1.00mm x 0.50mm)", Supplier 1=DigiKey
R16_1 R16_2 R16_3 R16_4: library part RP73PF1E5K62BTD, "RES 5.62K OHM 0.1% 1/10W 0402", Device Package="0402 (1005 Metric)", Manufacturer="TE Connectivity Passive Product", Operating Temperature="-55°C ~ 155°C", Power (Watts)="0.1W, 1/10W", Resistance="5.62 kOhms", Supplier Device Package=0402, Supplier Part Number 1=A127391CT-ND, Temperature Coefficient=±25ppm/°C, Tolerance=±0.1%, ComponentLink1Description=Datasheet, ComponentLink1URL=https://www.te.com/commerce/DocumentDelivery/DDEController?Action=srchrtrv&DocNm=1773272&DocType=DS&DocLang=English, ComponentLink2Description="DigiKey Link", ComponentLink2URL=https://www.digikey.com/en/products/detail/te-connectivity-passive-product/RP73PF1E5K62BTD/8260933, Composition="Thin Film", Height - Seated (Max)="0.014\" (0.35mm)", LastUpdated="2/9/2024 8:30:24 PM", Lifecycle Status=Active, Minimum Order=1, Number of Terminations=2, Package / Case="0402 (1005 Metric)", Packaging=TapeAndReel, Part Number=RP73PF1E5K62BTD, Part Status=Active, PartId=2425, Price=0.08, Series="RP73, Holsworthy", Size / Dimension="0.039\" L x 0.020\" W (1.00mm x 0.50mm)", Supplier 1=DigiKey
R17 R18: library part CRCW040210K0DHEDP, "RES SMD 10K OHM 0.5% 1/16W 0402", Device Package="0402 (1005 Metric)", Manufacturer="Vishay Dale", Operating Temperature="-55°C ~ 155°C", Power (Watts)="0.063W, 1/16W", Ratings=AEC-Q200, Supplier Device Package=0402, Supplier Part Number 1=541-10KAVCT-ND, Temperature Coefficient=±50ppm/°C, Tolerance=±0.5%, ComponentLink1Description=Datasheet, ComponentLink1URL=http://www.vishay.com/docs/20036/dcrcwpe3.pdf, ComponentLink2Description="DigiKey Link", ComponentLink2URL=https://www.digikey.com/en/products/detail/vishay-dale/CRCW040210K0DHEDP/3593893, Composition="Thick Film", Features="Automotive AEC-Q200", Height - Seated (Max)="0.016\" (0.40mm)", LastUpdated="9/24/2023 7:25:38 PM", Lifecycle Status=Active, Minimum Order=1, Number of Terminations=2, Package / Case="0402 (1005 Metric)", Packaging=TapeAndReel, Part Number=CRCW040210K0DHEDP, Part Status=Active, PartId=5057, Price=0.03, Resistance="10 kOhms", Series=CRCW-P, Size / Dimension="0.039\" L x 0.020\" W (1.00mm x 0.50mm)", Supplier 1=DigiKey
U1: library part PIC32MZ0512EFE064-I/PT, "32-bit Microcontrollers - MCU 32-BIT MCU 512KB FL 128KB RAM, No Crypto", Package="TQFP-64 Microchip", Availability=Unavailable, MF=Microchip, MP=PIC32MZ2048EFG064T-I/PT, Price=None, SnapEDA_Link=https://www.snapeda.com/parts/PIC32MZ2048EFG064T-I/PT/Microchip/view-part/565997/?ref=snap
U2: "802.15.4 Zigbee Transceiver Module 2.4GHz Antenna Not Included, U.FL Surface Mount", Package="SMD-34 Digi International", Availability=Unavailable, MF="Digi International", MP=XB3-24Z8UM-J, Price=None, SnapEDA_Link=https://www.snapeda.com/parts/XB3-24Z8UM-J/Digi%20International/view-part/2762908/?ref=snap
U4: "5V fixed step down Buck"
U5_1 U5_2 U5_3 U5_4: library part TLV74033PDQNR
U6: "Magnetometer"
U8 U9 U10: "11-V, 1-A H-bridge motor driver 8-WSON -40 to 85", Package="WSON-8 Texas Instruments", Availability=Good, DigiKey-Purchase-URL=https://snapeda.com/shop?store=DigiKey&id=617854, MF="Texas Instruments", Mouser-Purchase-URL=https://snapeda.com/shop?store=Mouser&id=617854, MP=DRV8837CDSGR, Price=None, SnapEDA_Link=https://www.snapeda.com/parts/DRV8837CDSGR/Texas%20Instruments/view-part/617854/?ref=snap, Texas_Instruments-Purchase-URL=https://snapeda.com/shop?store=Texas+Instruments&id=617854
UART1 UART2 UART3: "CONN HEADER SMD 3POS 1MM", Current Rating (Amps)=0.7A, Insulation Color=Natural, Manufacturer="JST Sales America Inc.", Material Flammability Rating="UL94 V-0", Operating Temperature="-25°C ~ 85°C", Supplier Part Number 1=455-1789-1-ND, Voltage Rating=50V, ComponentLink1Description=Datasheet, ComponentLink1URL=http://www.jst-mfg.com/product/pdf/eng/eSR.pdf, ComponentLink2Description="DigiKey Link", ComponentLink2URL=http://digikey.com/product-detail/en/jst-sales-america-inc/BM03B-SRSS-TB-LF-SN/455-1789-1-ND/926860, Connector Type=Header, Contact Finish - Mating=Tin, Contact Finish - Post=Tin, Contact Material="Copper Alloy", Contact Shape=Square, Contact Type="Male Pin", Fastening Type=Push-Pull, Features="Solder Retention", Insulation Height="0.167\" (4.25mm)", Insulation Material="Polyamide (PA), Nylon", LastUpdated="1/12/2020 10:12:14 PM", Lifecycle Status=Active, Minimum Order=1, Mounting Type="Surface Mount", Number of Positions=3, Number of Positions Loaded=All, Number of Rows=1, Packaging=TapeAndReel, Part Number=BM03B-SRSS-TB(LF)(SN), Part Status=Active, PartId=14, Pitch - Mating="0.039\" (1.00mm)", Price=0.24, Series=SR, Shrouding="Shrouded - 4 Wall", Style="Board to Cable/Wire", Supplier 1=DigiKey, Termination=Solder

## Free pads (board coordinates)
  round 0 hole 3.1 unplated: 1(-14.4,52.5)

## Via types
v1: diameter 0.45, hole 0.3, Top Layer to Bottom Layer, tented both sides, 132 vias

## Nets (pads, with @x,y where several pads share a name; then routed paths per layer and width w, separated by ;. In a path a pad name is that pad's centre, name@x,y a point inside that pad or via, vN(x,y) a via of type N, cw(c..) or ccw(c..) an arc to the next point about the centre after c; other vN are vias at no path point)
3V3: C8.1 C10_4.2 C12.1 C20.2 C21.2 C22.2 C23.2 C24.2 C27.2 C28.1 ICSP1.2 R8.1 R9.1 R10.1 R11.1 U1.8 U1.19 U1.26 U1.34 U1.39 U1.54 U1.60 U5_4.1 U8.8 U9.8 U10.8 | length 52.6
  Top Layer w0.15: C10_4.2 22,-5.72 22.285,-6.005 U5_4.1
  Top Layer w0.254: v1(9.43,-2.67) 10.07,-2.67 C23.2 10.273,-2.467 10.425,-2.467 10.442,-2.45 U1.60 ; v1(9.46,0.74) C27.2 10.273,0.567 10.425,0.567 10.442,0.55 U1.54 ; v1(14.7,-7.6) 14.753,-7.6 14.98,-7.373 15.377,-7.373 15.55,-7.2 R11.1 15.54,-7.115 C24.2 15.54,-6.18 15.35,-5.99 U1.8 ; U1.39 16.35,4.59 16.54,4.78 C22.2 v1(16.54,5.44) ; U1.34 18.85,4.45 19.062,4.662 19.562,4.662 v1(19.6,4.7) ; U1.19 20.89,-3.45 21.08,-3.64 C20.2 v1(21.74,-3.64) 21.74,-3.693 22,-3.953 v1(22,-4.3) v1(22,-4.9) C10_4.2 ; U1.26 20.89,0.05 21.08,0.24 C21.2 v1(21.74,0.24)
  Layer 2 w0.45: v1(-4,-7.86) -2.64,-6.5 2.3,-6.5 ; v1(2.3,-7.86) 2.3,-6.5 ; v1(8.6,-7.86) 8.6,-6.5 ; v1(9.43,-2.67) 8.6,-3.5 8.6,-6.5 ; 2.3,-6.5 8.6,-6.5
  Bottom Layer w0.127: C28.1 v1(-4,-7.86) ; C12.1 v1(2.3,-7.86) ; C8.1 v1(8.6,-7.86)
  Bottom Layer w0.254: C28.1 R10.1 ; C12.1 R9.1 ; C8.1 R8.1 ; ICSP1.2 14.175,10.7 16.54,8.335 v1(16.54,5.44)
  Bottom Layer w0.275: U10.8 -5.65,-8.085 -5.425,-7.86 C28.1 ; U9.8 0.65,-8.085 0.875,-7.86 C12.1 ; U8.8 6.95,-8.085 7.175,-7.86 C8.1
3V3_EN_1: R16_1.2 U5_1.3 | length 0.8
  Bottom Layer w0.127: R16_1.2 42.588,-10.3 42.825,-10.064 U5_1.3
3V3_EN_2: R16_2.2 U5_2.3 | length 0.8
  Top Layer w0.127: R16_2.2 -1.012,8.4 -0.775,8.164 U5_2.3
3V3_EN_3: R16_3.2 U5_3.3 | length 0.8
  Top Layer w0.127: R16_3.2 21.74,13.888 21.976,14.125 U5_3.3
3V3_EN_4: R16_4.2 U5_4.3 | length 0.8
  Top Layer w0.127: U5_4.3 21.635,-7.664 21.872,-7.9 R16_4.2
3V3_ESP: C10_1.2 C30.2 C31.2 R17.1 R18.2 U5_1.1 U7.2 | length 28.8
  Layer 2 w0.254: v1(42.5,-7.4) v1(42.5,-5.8) 42.5,9.3 v1(44.2,11)
  Bottom Layer w0.15: U5_1.1 42.175,-8.405 42.46,-8.12 C10_1.2 C10_1.2@42.5,-8.06
  Bottom Layer w0.254: R17.1 37.425,-7.225 R18.2 39.6,-7.225 C30.2 42.372,-7.325 42.447,-7.4 v1@42.46,-7.4 ; C10_1.2@42.5,-8.06 42.46,-8.02 v1@42.46,-7.4 ; v1(42.5,-7.4) v1@42.46,-7.4 ; v1(42.5,-5.8) 42.48,-5.82 42.48,-6.58 C31.2 v1@42.46,-7.4 ; U7.2 42.905,11 v1(44.2,11) v1@44.263,11
3V3_IMU: C7.1 C10_2.2 C13.1 C17.1 C18.1 U3.8 U3.13 U5_2.1 U6.5 U6.6 U6.10 | length 33.8
  Top Layer w0.15: U5_2.1 -1.425,6.505 C10_2.2@-1.14,6.22
  Top Layer w0.254: C17.1@-7.04,0.62 -6.852,0.808 -6.852,1.373 U6.5 U6.6 ; U6.10 C18.1@-5.03,3.05 ; C13.1@2.65,-0.29 U3.8 ; U3.13 6.4,1.45
  Top Layer w0.4: C17.1@-7.04,0.62 C17.1 -7.04,0.58 -6.94,0.48 -6.94,0.14 -6.5,-0.3 -1.14,-0.3 ; C18.1 -1.14,2.84 ; C10_2.2@-1.14,6.22 C10_2.2 -1.14,2.84 ; C13.1@2.65,-0.29 C13.1 2.637,-0.303 2.637,-0.966 2.403,-1.2 ; C7.1 6.4,1.45 6.4,-0.3 5,-1.7 2.903,-1.7 2.403,-1.2 ; -1.14,-0.3 -0.24,-1.2 2.403,-1.2 ; -1.14,-0.3 -1.14,2.84
3V3_XBee: C6.1 C10_3.2 U2.2 U5_3.1 | length 6.6
  Top Layer w0.15: U5_3.1 23.635,13.475 23.92,13.76 C10_3.2
  Top Layer w0.254: C10_3.2 27.18,13.76 27.78,14.36 C6.1 29.279,14.36 U2.2
5V: C2.2 C3.2 C9_1.2 C9_2.2 C9_3.2 C9_4.2 L1.2 R5.1 R16_1.1 R16_2.1 R16_3.1 R16_4.1 U4.1 U5_1.4 U5_2.4 U5_3.4 U5_4.4 | length 20.7
  Top Layer w0.2: C9_2.2 -2.175,7.165 -2.175,7.73 ; R16_2.1 -2.175,7.73 ; U5_2.4 -2.175,7.73 ; R16_3.1 22.41,12.725 ; U5_4.4 23.035,-7.23 ; U5_3.4 22.41,12.725 ; C9_3.2 22.975,12.725 22.41,12.725 ; R16_4.1 23.035,-7.23 ; C9_4.2 23.035,-6.665 23.035,-7.23
  Top Layer w0.254: v1(-2.925,7.14) C9_2.2 ; v1(-2.9,8.4) R16_2.1 ; v1(21.74,12) R16_3.1 ; v1(23,11.975) C9_3.2 ; C9_4.2 v1(23.785,-6.64) ; v1(23.76,-7.9) R16_4.1 23.035,-10.335 24.84,-12.14 C2.2 ; R5.1 v1@25.4,-13.7
  Bottom Layer w0.2: C9_1.2 41.425,-9.065 41.425,-9.63 ; R16_1.1 41.425,-9.63 ; U5_1.4 41.425,-9.63
  Bottom Layer w0.254: v1(40.65,-10.3) R16_1.1@41.375,-10.3 ; v1(40.675,-9.04) C9_1.2
  other v1: 25.4,-14.8 25.4,-13.9 25.4,-13 26.8,-12.5 26.8,-11.5
5VREG_BST: C1.1 U4.6 | length 1.1
  Top Layer w0.254: C1.1 27.45,-13.86 U4.6
5VREG_SW: C1.2 L1.1 U4.5 | length 5.2
  Top Layer w0.254: C1.2 28.26,-14.74 28.4,-14.6 U4.5
  Top Layer w0.6: U4.5 28.4,-12.975 28.8,-12.575 29.075,-12.575 29.375,-12.275 L1.1
A_OUT1: J2.1 U8.2 | length 0.9
  Bottom Layer w0.127: U8.2 6.45,-10.846 6.7,-11.095 v1(6.7,-11.1)
A_OUT2: J2.2 U8.3 | length 0.9
  Bottom Layer w0.127: v1(5.7,-11.1) 5.7,-11.095 5.95,-10.846 U8.3
B_OUT1: J3.1 U9.2 | length 0.9
  Bottom Layer w0.127: U9.2 0.15,-10.846 0.4,-11.096 v1(0.4,-11.1)
B_OUT2: J3.2 U9.3 | length 0.9
  Bottom Layer w0.127: v1(-0.6,-11.1) -0.6,-11.096 -0.35,-10.846 U9.3
C\S\: U7.19
C_OUT1: J4.1 U10.2 | length 0.9
  Bottom Layer w0.127: U10.2 -6.15,-10.846 -5.9,-11.095 v1(-5.9,-11.1)
C_OUT2: J4.2 U10.3 | length 0.9
  Bottom Layer w0.127: v1(-6.9,-11.1) -6.9,-11.095 -6.65,-10.846 U10.3
ESP_DIN: R14.1 U7.27 | length 1.7
  Bottom Layer w0.127: R14.1 24.36,-1.66 U7.27
ESP_DIN_R: R14.2 U1.4 | length 19.2
  Top Layer w0.127: v1(13.1,-6.2) 13.1,-6.113 13.35,-5.863 U1.4
  Bottom Layer w0.127: v1(13.1,-6.2) 13.6,-5.7 15.6,-5.7 16.3,-6.4 17,-6.4 20.2,-3.2 20.2,0.9 20.608,1.308 21.113,1.308 21.294,1.126 21.294,0.098 21.617,-0.224 21.975,-0.224 23.2,-1.45 R14.2
ESP_DOUT: R15.1 U7.28 | length 1.7
  Bottom Layer w0.127: R15.1 24.31,-0.39 U7.28
ESP_DOUT_R: R15.2 U1.11 | length 13.7
  Top Layer w0.127: U1.11 16.875,-5.16 16.875,-5.875 v1(16.9,-5.9)
  Bottom Layer w0.127: v1(16.9,-5.9) 19.8,-3 19.8,1.1 20.4,1.7 21.3,1.7 22.045,0.955 22.045,0.705 23.2,-0.45 R15.2
ESP_EN: C32.2 J_ESP.1 R17.2 U7.3 | length 48.5
  Layer 1 w0.127: v1(21.9,6.6) 41.1,6.6 44.2,9.7 v1(44.2,9.77)
  Layer 2 w0.254: v1(21.9,6.6) 35.362,-6.863 35.362,-7.162 v1(35.4,-7.2)
  Bottom Layer w0.127: J_ESP.1 v1(21.9,6.6) 21.94,6.64 C32.2 ; v1(35.4,-7.2) R17.2
  Bottom Layer w0.254: U7.3 v1(44.2,9.77) v1@44.263,9.77
GND: C2.1 C3.1 C4.1 C5.1 C6.2 C7.2 C8.2 C9_1.1 C9_2.1 C9_3.1 C9_4.1 C10_1.1 C10_2.1 C10_3.1 C10_4.1 C11.1 C12.2 C13.2 C14.2 C15.2 C16.2 C17.2 C18.2 C19.2 C20.1 C21.1 C22.1 C23.1 C24.1 C25.2 C26.1 C27.1 C28.2 C29.1 C30.1 C31.1 C32.1 D1.2 ICSP1.3 J_ESP.3 P1.1 U1.7 U1.20 U1.25 U1.35 U1.40 U1.55 U1.59 U1.65 U2.1 U2.10 U2.12 U2.21 U2.32 U2.34 U3.1 U3.9 U3.11 U3.18 U3.25 U4.4 U5_1.2 U5_1.5 U5_2.2 U5_2.5 U5_3.2 U5_3.5 U5_4.2 U5_4.5 U6.2 U6.3 U6.9 U6.12 U7.1 U7.15 U7.38 U7.39 U8.4 U8.9 U9.4 U9.9 U10.4 U10.9 UART1.3 UART2.3 UART3.3 | length 66.4
  Top Layer w0.127: U6.9 -5.638,2.488 -5.349,2.488 -4.82,1.96 C18.2 ; v1(-3,6.26) C9_2.1 ; C9_4.1 v1(23.86,-5.76) ; v1(23.88,11.9) C9_3.1
  Top Layer w0.2: v1(-0.3,7.3) U5_2.5 -1.1,7.195 U5_2.2 -0.26,6.87 C10_2.1 ; C10_4.1 21.12,-6.37 U5_4.2 21.96,-6.695 U5_4.5 v1(21.16,-6.8) ; v1(22.84,14.6) U5_3.5 22.945,13.8 U5_3.2 23.27,14.64 C10_3.1
  Top Layer w0.254: v1(-8.4,2.9) -8.4,2.55 ; C19.2@-8.38,2.14 C19.2 ; U6.3 -7.502,2.052 -8.312,2.052 C19.2 ; U6.2 -8.4,2.55 ; v1(-7.4,-16.2) UART3.3 ; U6.12 v1(-6.85,3.9) ; C17.2 v1(-5.4,0.6) v1(-4.8,1.2) C18.2 ; v1(-1.1,-16.2) UART1.3 ; v1(1,-0.3) C13.2 ; U3.1 1.448,3.902 2.098,3.902 U3.25@2.6,3.4 ; v1(3.2,-1.1) 3.194,-1.094 3.194,0.681 U3.9 3.15,2.45 v1(3.4,2.7) ; U3.11 U3.25@4.15,1.6 ; U3.11@4.164,0.711 4.198,0.677 4.198,0.243 4.467,-0.026 4.467,-0.127 C14.2 v1(5.5,-0.3) ; U3.25@4.3,3.5 4.702,3.902 5.352,3.902 U3.18 5.4,5.42 5.23,5.59 5.14,5.68 C15.2 ; v1(5.2,-16.2) UART2.3 ; C15.2@5.24,5.6 5.278,5.637 5.962,5.637 v1(6,5.6) ; U3.18@5.411,3.961 5.425,3.975 6.375,3.975 v1(6.4,4) C7.2 ; v1(9.44,-1.76) C23.1@10.08,-1.76 ; v1(9.44,-0.14) C27.1@10.08,-0.14 ; C23.1 10.273,-1.933 10.425,-1.933 10.442,-1.95 U1.59 ; C27.1 10.273,0.033 10.425,0.033 10.442,0.05 U1.55 ; v1(14.66,-6.86) C24.1@14.66,-6.22 ; C24.1 14.66,-6.18 14.85,-5.99 U1.7 ; v1(15,-8.2) C25.2@15.64,-8.2 ; C22.1 15.833,4.627 15.833,4.475 15.85,4.458 U1.40 ; C22.1@15.66,4.82 v1(15.66,5.46) ; v1(15.7,-13.7) D1.2 ; U1.20 20.89,-2.95 21.08,-2.76 C20.1 ; U1.25 20.79,-0.45 20.807,-0.467 20.927,-0.467 C21.1 ; C20.1@21.12,-2.76 v1(21.76,-2.76) ; C21.1@21.12,-0.64 v1(21.76,-0.64) ; C6.2 29.245,15.24 U2.1 ; U4.4 29.35,-14.05 29.699,-14.399 30.339,-14.399 C5.1 ; C5.1@30.42,-14.46 31.365,-14.46 C4.1 ; C19.2 -8.4,2.55
  Bottom Layer w0.127: v1(40.6,-8.16) C9_1.1
  Bottom Layer w0.2: v1(43.3,-9.2) U5_1.5 42.5,-9.095 U5_1.2 43.34,-8.77 C10_1.1
  Bottom Layer w0.254: U10.4 -7.15,-9.75 U10.9@-6.9,-9.5 ; U9.4 -0.85,-9.75 U9.9@-0.6,-9.5 ; U8.4 5.45,-9.75 U8.9@5.7,-9.5
  Bottom Layer w0.3: v1(-6.4,-9.3) v1@-4.7,-9.3 ; C29.1 v1@-4.7,-9.3 ; C28.2 v1@-4.7,-9.3 ; v1(-0.1,-9.3) v1(1.6,-9.3) ; C26.1 v1(1.6,-9.3) ; C12.2@1.6,-8.74 v1(1.6,-9.3) ; v1(6.2,-9.3) v1(7.9,-9.3) ; C11.1 v1(7.9,-9.3) ; C8.2 v1(7.9,-9.3)
  other v1: -4.7,-9.3 13.4,-2.9 15.6,-2.9 17.8,-2.9 14.5,-1.8 16.7,-1.8 13.4,-0.7 15.6,-0.7 17.8,-0.7 14.5,0.4 16.7,0.4 13.4,1.5 15.6,1.5 17.8,1.5
IO_0: J_ESP.2 R18.1 U7.25 | length 29.7
  Top Layer w0.127: v1(20.9,6.6) 20.9,2.983 24.467,-0.583 v1(24.467,-4.2)
  Bottom Layer w0.127: v1(20.9,6.6) J_ESP.2 ; U7.25 25.865,-4.867 29.373,-8.375 R18.1
  Bottom Layer w0.254: v1(24.467,-4.2) U7.25
MCLR: C25.1 ICSP1.1 R11.2 U1.9 | length 27.5
  Top Layer w0.127: U1.9 15.916,-5.202 15.916,-5.687 16.464,-6.234 16.464,-6.963 R11.2@16.7,-7.2 ; C25.1 16.54,-7.36 R11.2@16.7,-7.2 ; R11.2 R11.2@16.7,-7.2 ; v1(17.5,-7.4) 16.9,-7.4 R11.2@16.7,-7.2
  Layer 1 w0.127: v1(15,11.7) 15,9.5 14.484,8.984 14.484,7.528 14.812,7.2 15.5,7.2 18.5,4.2 18.5,-6.4 v1(17.5,-7.4)
  Bottom Layer w0.127: ICSP1.1 v1(15,11.7)
MOTOR.A_IN1: U1.3 U8.6 | length 9.5
  Top Layer w0.127: v1(12.5,-6) 12.5,-5.979 12.783,-5.696 12.783,-5.202 U1.3
  Bottom Layer w0.127: U8.6 5.95,-7.824 6.1,-7.673 v1(6.1,-7.6) 6.1,-6.781 6.681,-6.2 10.7,-6.2 10.9,-6.4 12.1,-6.4 v1(12.5,-6)
MOTOR.A_IN2: U1.2 U8.5 | length 9.4
  Top Layer w0.127: v1(11.2,-5.9) 11.914,-5.9 12.17,-5.644 12.17,-5.615 12.284,-5.501 12.284,-5.201 U1.2
  Bottom Layer w0.127: U8.5 5.45,-7.824 5.3,-7.674 v1(5.3,-7.6) 5.3,-7 6.4,-5.9 v1(11.2,-5.9)
MOTOR.B_IN1: U1.1 U9.6 | length 14.4
  Top Layer w0.127: v1(11.2,-5.1) 11.815,-5.1 U1.1
  Bottom Layer w0.127: U9.6 -0.35,-7.823 -0.2,-7.673 v1(-0.2,-7.6) -0.2,-6.78 0.981,-5.6 10.7,-5.6 v1(11.2,-5.1)
MOTOR.B_IN2: U1.64 U9.5 | length 14.8
  Top Layer w0.127: v1(10.634,-4.987) 10.634,-4.899 10.838,-4.696 10.838,-4.517 10.904,-4.45 U1.64
  Bottom Layer w0.127: U9.5 -0.85,-7.823 -1,-7.674 v1(-1,-7.6) -1,-6.9 0.554,-5.346 10.275,-5.346 v1(10.634,-4.987)
MOTOR.C_IN1: U1.63 U10.6 | length 20.6
  Top Layer w0.127: v1(10.068,-4.874) 10.114,-4.828 10.114,-4.586 10.683,-4.017 11.098,-4.017 U1.63
  Bottom Layer w0.127: U10.6 -6.65,-7.823 -6.5,-7.673 v1(-6.5,-7.6) -6.5,-7.545 -6.233,-7.278 -6.233,-6.514 -4.609,-4.889 10.053,-4.889 v1(10.068,-4.874)
MOTOR.C_IN2: U1.62 U10.5 | length 21.5
  Top Layer w0.127: v1(10.006,-4.106) 10.626,-3.486 11.129,-3.486 U1.62
  Bottom Layer w0.127: U10.5 -7.15,-7.823 -7.3,-7.674 v1(-7.3,-7.6) -7.3,-6.6 -5.3,-4.6 9.512,-4.6 v1(10.006,-4.106)
NetC14_1: C14.1 U3.10 | length 1.1
  Top Layer w0.254: U3.10 3.65,-0.19 C14.1
NetC15_1: C15.1 U3.20 | length 1.1
  Top Layer w0.254: U3.20 4.15,5.59 C15.1
NetC19_1: C19.1 U6.4 | length 1.1
  Top Layer w0.254: C19.1 -7.79,1.26 -7.598,1.452 -7.598,1.548 -7.596,1.55 U6.4
NetD1_1: D1.1 R5.2 | length 4.8
  Top Layer w0.254: D1.1 R5.2
NetR8_2: R8.2 U8.7 | length 1.7
  Bottom Layer w0.127: U8.7 6.526,-8.239 6.526,-7.974 6.9,-7.6 R8.2
NetR9_2: R9.2 U9.7 | length 1.7
  Bottom Layer w0.127: U9.7 0.226,-8.239 0.226,-7.974 0.6,-7.6 R9.2
NetR10_2: R10.2 U10.7 | length 1.7
  Bottom Layer w0.127: U10.7@-6.15,-8.315 -6.074,-8.239 -6.074,-7.974 -5.7,-7.6 R10.2
PGC: ICSP1.5 U1.15 | length 17.9
  Top Layer w0.127: U1.15 18.85,-5.763 19,-5.913 v1(19,-6)
  Layer 1 w0.127: v1(14.9,7.7) 15.5,7.7 19,4.2 v1(19,-6)
  Bottom Layer w0.127: ICSP1.5 v1(14.9,7.7)
PGD: ICSP1.4 U1.16 | length 18
  Top Layer w0.127: U1.16 19.35,-5.333 19.416,-5.4 v1(19.8,-5.4)
  Layer 1 w0.127: v1(14.9,8.7) 19.8,3.8 v1(19.8,-5.4)
  Bottom Layer w0.127: ICSP1.4 v1(14.9,8.7)
RSSI: U2.7
RX1: R12.1 U1.29 | length 28.2
  Top Layer w0.127: U1.29 20.615,1.55 20.857,1.308 20.857,0.914 v1(20.879,0.892)
  Bottom Layer w0.127: R12.1 4.6,-14.4 6.1,-12.9 11,-12.9 20.6,-3.3 20.6,-1.7 20.879,-1.421 v1(20.879,0.892)
RX1_R: R12.2 UART1.1 | length 3.3
  Top Layer w0.254: v1(0.9,-16.2) UART1.1
  Bottom Layer w0.127: v1(0.9,-16.2) 0.9,-14.95 1.45,-14.4 R12.2
RX2: R1.1 U1.18 | length 18.7
  Top Layer w0.127: U1.18 20.101,-4.017 20.517,-4.017 v1(20.9,-4.4)
  Bottom Layer w0.127: R1.1 12.1,-15.2 20.9,-6.4 v1(20.9,-4.4)
RX2_R: R1.2 UART2.1 | length 2.4
  Top Layer w0.254: v1(7.2,-16.2) UART2.1
  Bottom Layer w0.127: v1(7.2,-16.2) 7.725,-15.675 R1.2
RX3: R3.1 U1.5 | length 22.6
  Top Layer w0.127: v1(13.829,-6.751) 13.829,-6.664 13.584,-6.419 13.584,-6.028 13.808,-5.805 13.808,-5.177 U1.5
  Bottom Layer w0.127: R3.1 -1,-14.4 1.4,-12 9.2,-12 13.829,-7.371 v1(13.829,-6.751)
RX3_R: R3.2 UART3.1 | length 3.3
  Top Layer w0.254: v1(-5.4,-16.2) UART3.1
  Bottom Layer w0.127: v1(-5.4,-16.2) -5.4,-15.15 -4.65,-14.4 R3.2
SCK: U7.20
SCL: U1.42 U3.23 U6.1 | length 26.1
  Top Layer w0.127: v1(14.484,4.7) 14.85,4.335 U1.42
  Top Layer w0.254: U6.1 v1(-7.5,3.5) ; U3.23 2.651,4.676 2.651,5.596 v1@2.652,5.597
  Bottom Layer w0.127: v1(-7.5,3.5) -7.5,4.2 -6.1,5.6 v1(2.65,5.6) 3.1,5.15 14.035,5.15 v1(14.484,4.7)
SDA: U1.41 U3.24 U6.11 | length 25.2
  Top Layer w0.127: v1(14.9,5.2) 14.9,4.671 15.284,4.287 15.284,3.801 U1.41
  Top Layer w0.254: U6.11 -6.35,3.321 -6.109,3.562 -5.638,3.562 v1(-5.6,3.6) ; v1(1.6,4.7) 2.125,4.7 U3.24
  Bottom Layer w0.127: v1(-5.6,3.6) -4.5,4.7 v1(1.6,4.7) 12.4,4.7 13.015,4.085 14.457,4.085 14.9,4.528 v1(14.9,5.2)
SDI: U7.22
SDO: U7.21
TX1: R13.1 U1.21 | length 25.9
  Top Layer w0.127: U1.21 20.101,-2.384 20.515,-2.384 20.837,-2.062 21.038,-2.062 v1(21.1,-2)
  Bottom Layer w0.127: R13.1 4.081,-15.4 6.281,-13.2 11.1,-13.2 21.1,-3.2 v1(21.1,-2)
TX1_R: R13.2 UART1.2 | length 3.9
  Top Layer w0.254: v1(-0.1,-16.2) UART1.2
  Bottom Layer w0.127: v1(-0.1,-16.2) 0.315,-16.616 1.072,-16.616 1.525,-16.163 R13.2
TX2: R2.1 U1.17 | length 16.9
  Top Layer w0.127: U1.17 20.234,-4.45 20.3,-4.517 v1(20.3,-5)
  Bottom Layer w0.127: R2.1 12.6,-14.2 20.3,-6.5 v1(20.3,-5)
TX2_R: R2.2 UART2.2 | length 3.8
  Top Layer w0.254: v1(6.2,-16.2) UART2.2
  Bottom Layer w0.127: v1(6.2,-16.2) 6.2,-15.65 7.65,-14.2 R2.2
TX3: R4.1 U1.6 | length 24.1
  Top Layer w0.127: v1(14,-6.2) 14.062,-6.138 14.062,-5.838 14.283,-5.616 14.283,-5.202 U1.6
  Bottom Layer w0.127: R4.1 -1.5,-15.4 1.6,-12.3 9.4,-12.3 14.245,-7.455 14.245,-6.688 14.553,-6.38 14.553,-6.274 14.478,-6.2 v1(14,-6.2)
TX3_R: R4.2 UART3.2 | length 4.2
  Top Layer w0.254: v1(-6.4,-16.2) UART3.2
  Bottom Layer w0.127: v1(-6.4,-16.2) -5.9,-16.7 -5.1,-16.7 -4.575,-16.175 R4.2
U0RX: J_ESP.4 U7.34 | length 8.4
  Bottom Layer w0.127: J_ESP.4 18.9,8.313 19.487,8.9 23.645,8.9 25.315,7.23 U7.34
U0TX: J_ESP.5 U7.35 | length 9.1
  Bottom Layer w0.127: J_ESP.5 18.137,8.074 18.137,8.637 18.7,9.2 23.8,9.2 24.5,8.5 U7.35
VBAT: C4.2 C5.2 C11.2 C16.1 C26.2 C29.2 P1.2 U4.2 U4.3 U8.1 U9.1 U10.1 | length 22.2
  Top Layer w0.6: U4.2 U4.3 30.4,-16.1 ; C5.2 30.4,-16.1 ; C16.1 35.275,-17.5 ; P1.2 35.275,-17.5 ; 30.4,-16.1 31.025,-16.1 31.55,-15.575 31.65,-15.575 32.475,-16.4 33.3,-16.4 34.4,-17.5 35.275,-17.5
  Bottom Layer w0.254: C29.2 -4.68,-10.72 v1(-3.92,-10.72) ; C26.2 v1(2.36,-10.74) ; C11.2 v1(8.66,-10.74)
  Bottom Layer w0.275: U10.1 -5.65,-10.515 -5.426,-10.74 C29.2 ; U9.1 0.65,-10.515 0.874,-10.74 C26.2 ; U8.1 6.95,-10.515 7.174,-10.74 C11.2
XBEE_DIN: R6.2 U2.4 | length 2
  Top Layer w0.254: R6.2 29.24,11.9 U2.4
XBEE_DIN_R: R6.1 U1.45 | length 19.6
  Top Layer w0.127: v1(13.323,4.5) 13.337,4.487 13.337,3.748 U1.45 ; R6.1 26.5,11.9 27.438,10.962 27.538,10.962 v1(27.6,10.9)
  Layer 2 w0.127: v1(13.323,4.5) 13.323,5.023 19.2,10.9 v1(27.6,10.9)
XBEE_DOUT: R7.2 U2.3 | length 1.9
  Top Layer w0.254: R7.2 29.404,12.9 U2.3
XBEE_DOUT_R: R7.1 U1.44 | length 21.1
  Top Layer w0.127: U1.44 13.875,3.76 13.875,4.475 v1(13.9,4.5) ; R7.1 26.35,12.9 25.859,12.41 25.859,11.521 27.181,10.2 v1(27.6,10.2)
  Layer 2 w0.127: v1(13.9,4.5) 13.9,5 19.1,10.2 v1(27.6,10.2)